# EAGLE board SparkFun_BME280_Breakout_Panel_v10 (EAGLE 7.3.0), part 1 of 9
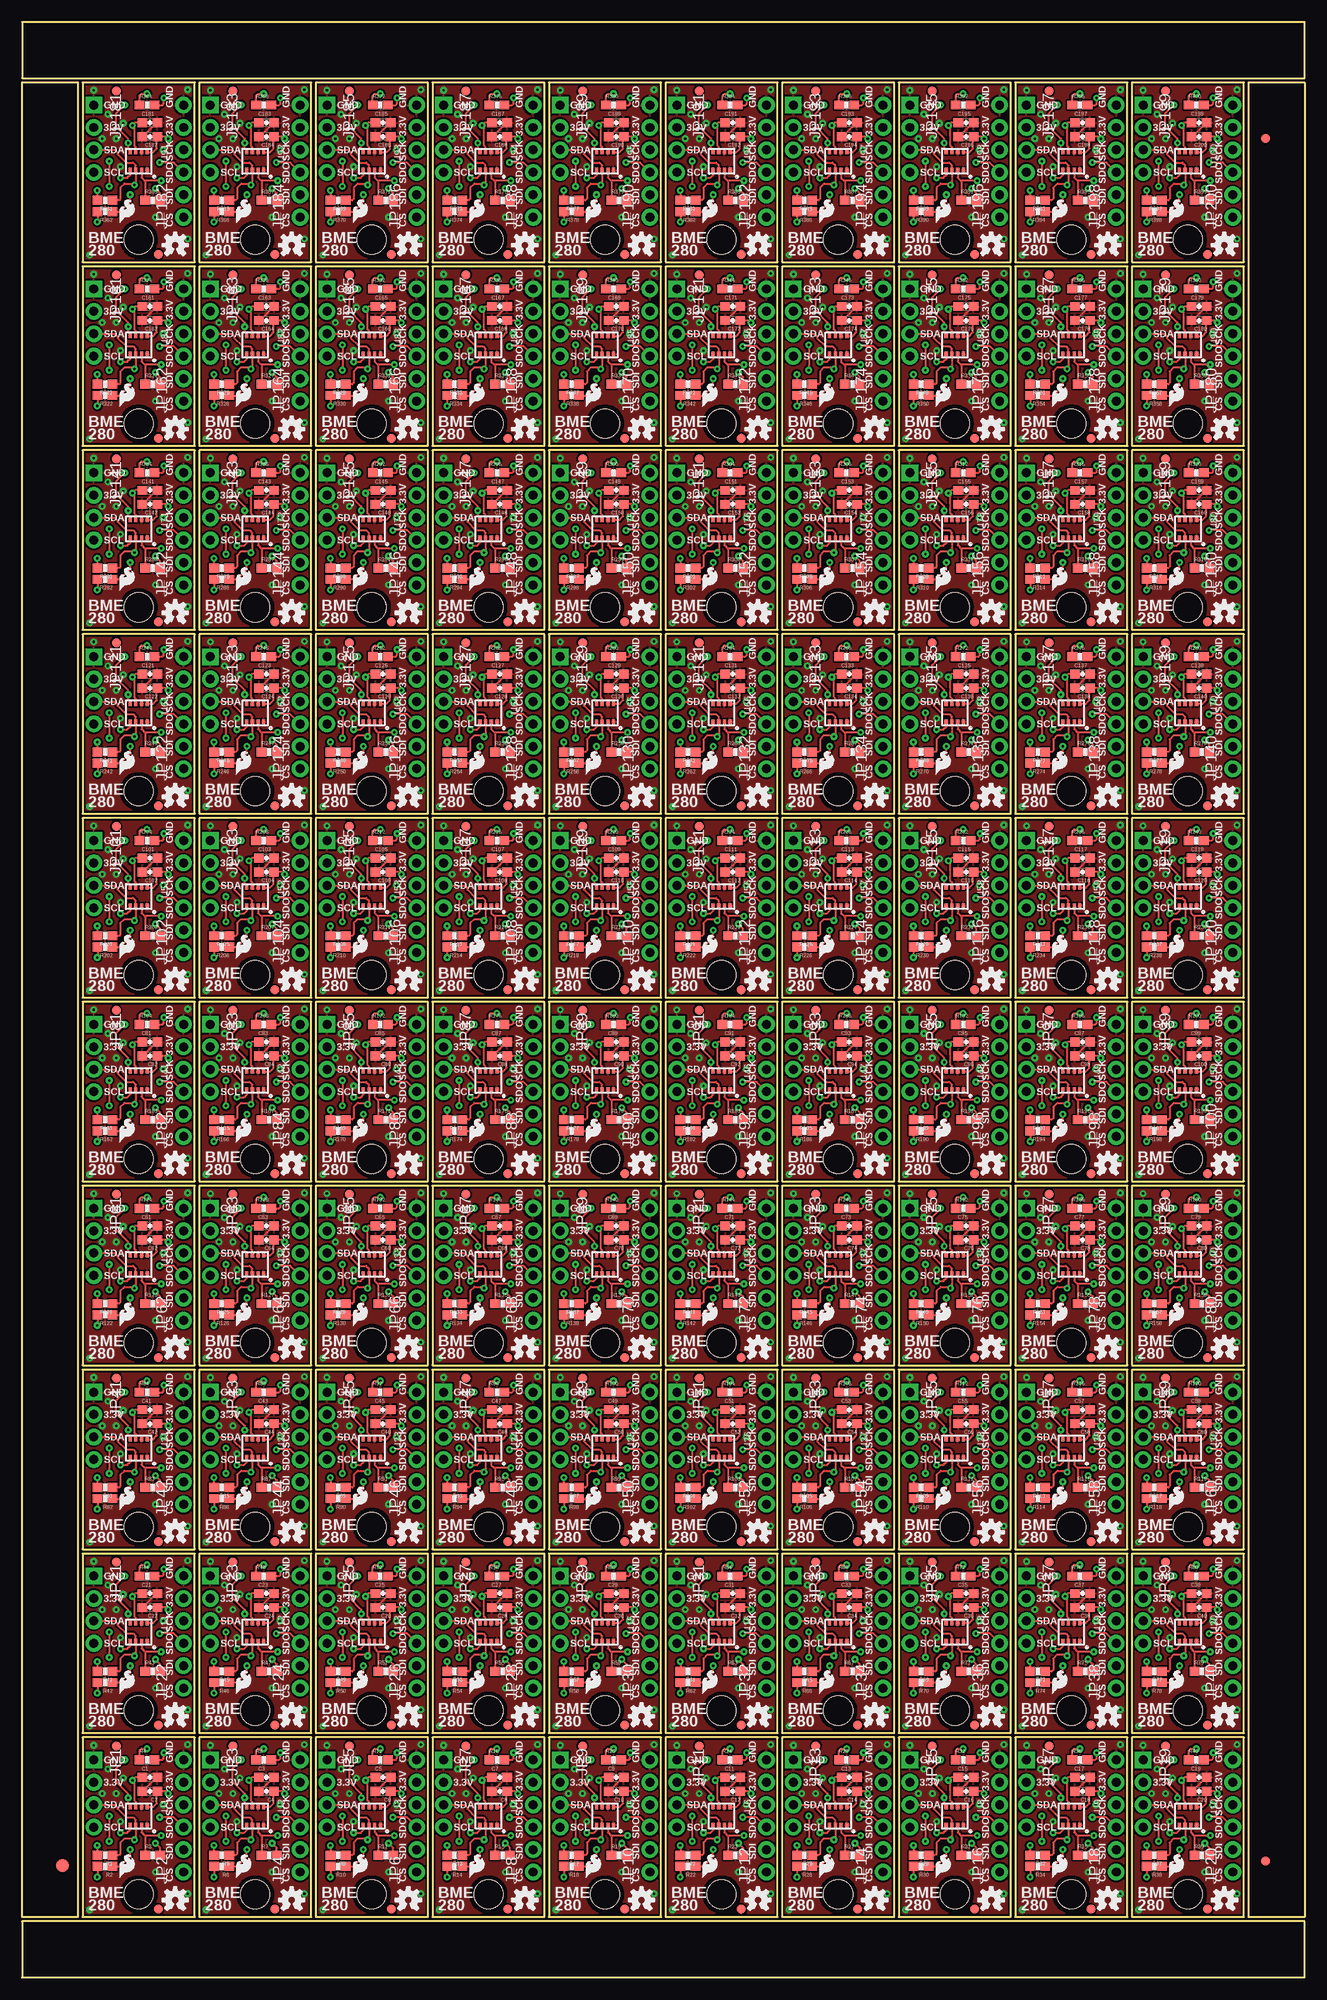
[diagram p0: board, top side]
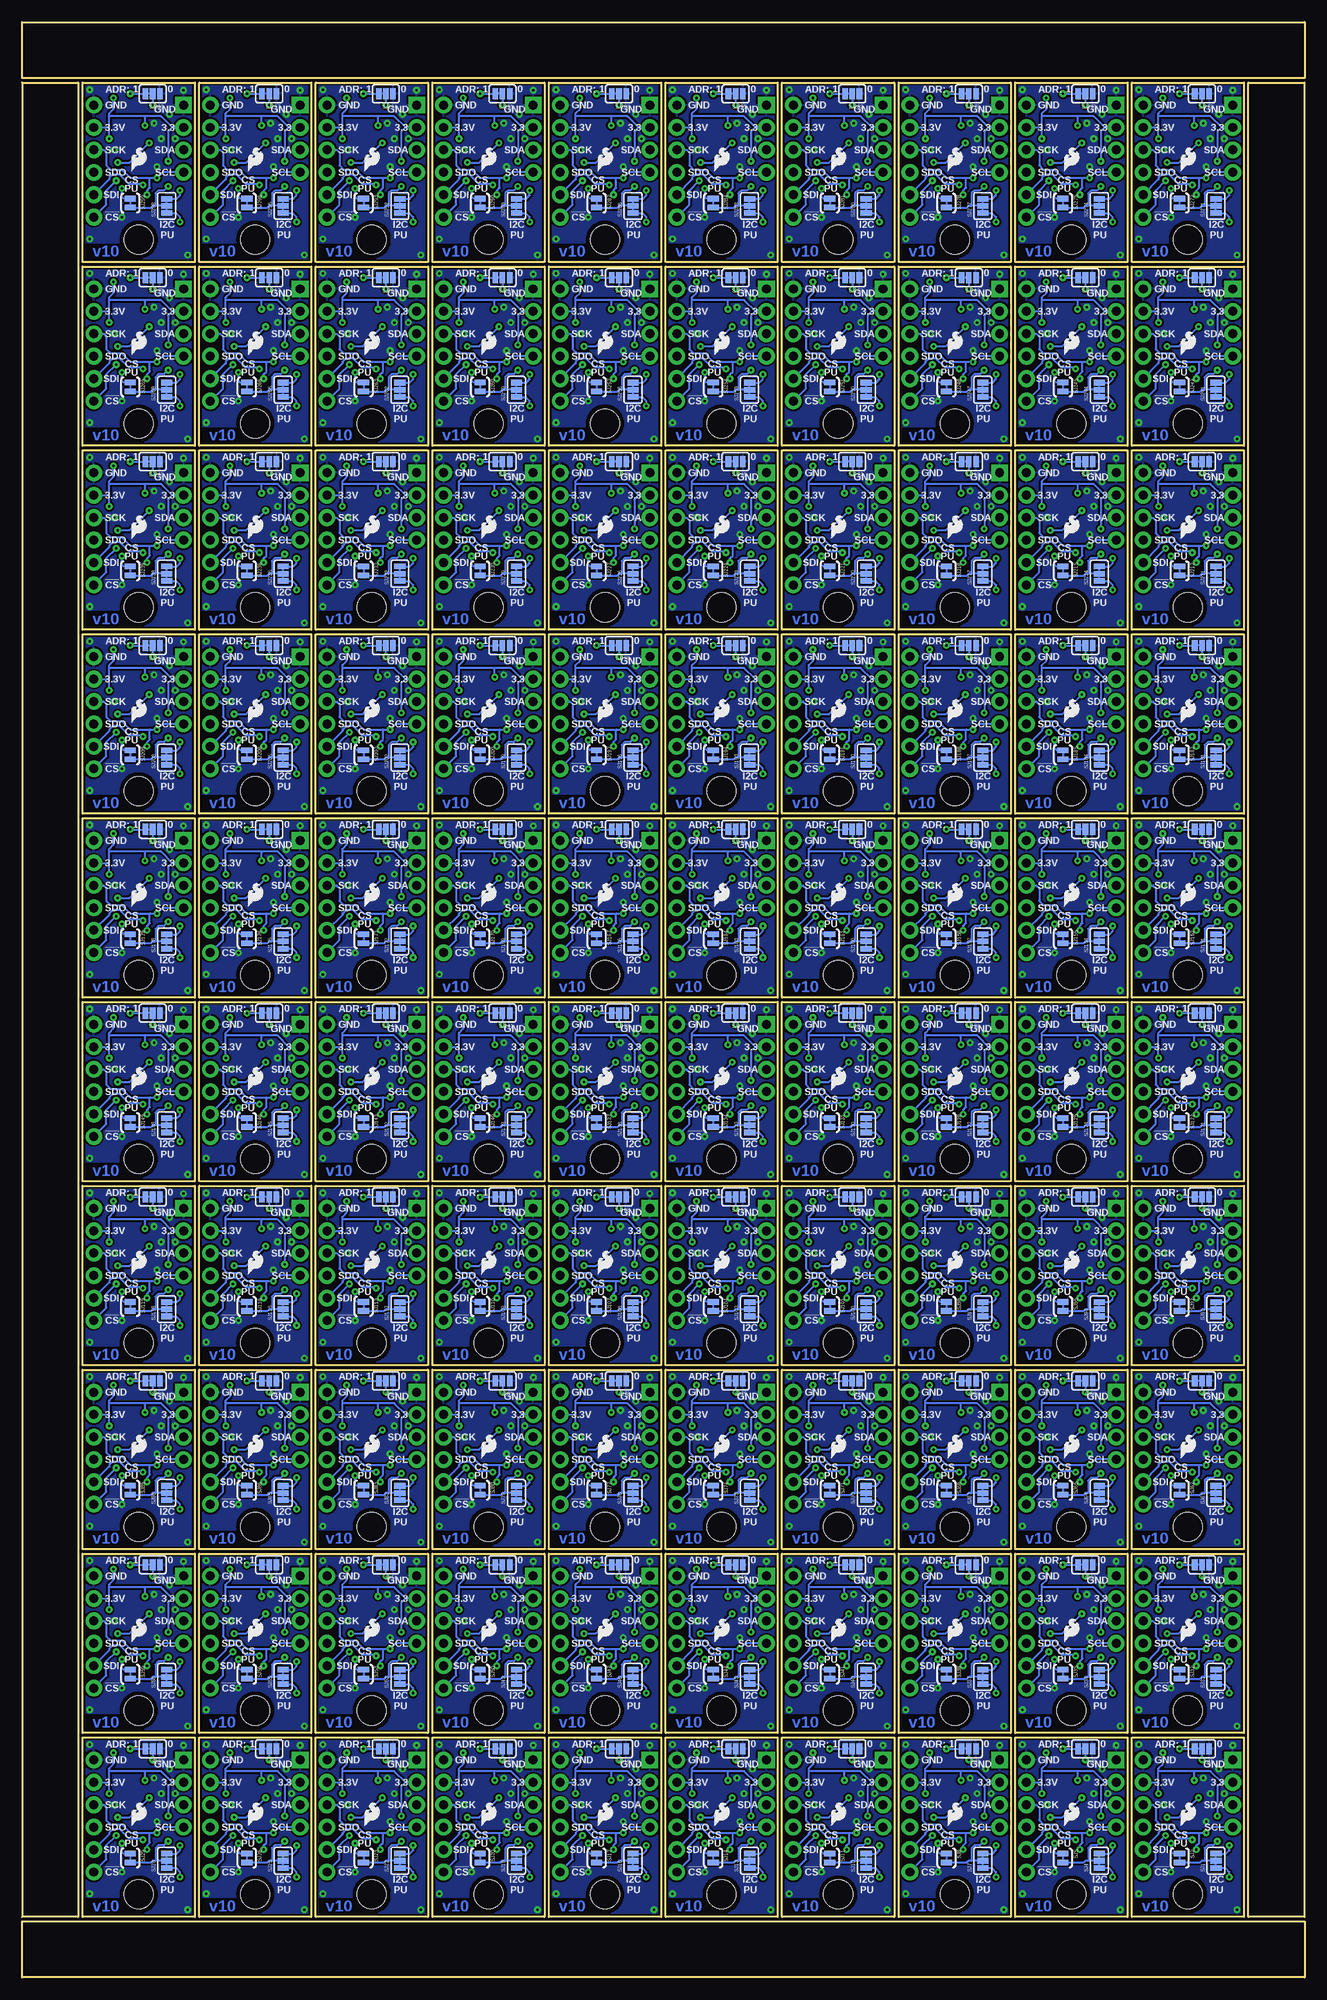
[diagram p1: board, bottom side, seen from below]

Size 145.29 x 221.49 mm. Coordinates in mm from the lower left corner, seen from the top.
Outline: 416 segments
Copper layers (1*16): Top 0.035mm / dielectric 1.5mm / Bottom 0.035mm
Design rules "SparkFun-2-layer": minimum track width 7mil, minimum drill 15mil, track to track 8mil, track to pad 8mil, pad to pad 8mil, via to via 8mil, smd to smd 8mil, copper to edge 8mil, drill to drill 8mil, minimum pad ring 12mil, minimum via ring 10mil, stop-mask expansion 4mil, vias tented up to drill 20mil, thermal gap 10mil

## Footprints (pad centres in the part's own frame; a part is rotated, then mirrored left to right if it is on the bottom)
0603-CAP = smd 1.1 x 1: 1 -0.85,0; 2 0.85,0
FIDUCIAL-1.5X3 = smd 1.5 x 1.5: 1 0,0
FIDUCIAL-1X2 = smd 1 x 1: 1 0,0
1X04_NO_SILK = drill 1.016 pad 1.88 square: 1 0,0 | drill 1.016 pad 1.88: 2 2.54,0; 3 5.08,0; 4 7.62,0
1X06_NO_SILK = drill 1.016 pad 1.88: 1 0,0; 2 2.54,0; 3 5.08,0; 4 7.62,0; 5 10.16,0; 6 12.7,0
0603-RES = smd 1.1 x 1: 1 -0.85,0; 2 0.85,0
PAD-JUMPER-3-3OF3_NC_BY_TRACE_YES_SILK_FULL_BOX = smd 0.635 x 1.27: 1 -0.813,0; 2 0,0; 3 0.813,0
PAD-JUMPER-2-NC_BY_TRACE_YES_SILK = smd 0.635 x 1.27: 1 -0.508,0; 2 0.508,0
PAD-JUMPER-3-2OF3_NC_BY_TRACE_YES_SILK_FULL_BOX = smd 0.635 x 1.27: 1 -0.813,0; 2 0,0; 3 0.813,0
STAND-OFF = hole 3.302: 0,0
BME280_LGA = smd 0.5 x 0.35: P$1 1.025,0.975; P$2 1.025,0.325; P$3 1.025,-0.325; P$4 1.025,-0.975; P$5 -1.025,-0.975; P$6 -1.025,-0.325; P$7 -1.025,0.325; P$8 -1.025,0.975

## Placement (x,y rotation side)
C1  0.1uF  [0603-CAP]  14.48,22.65 0 top
C2  0.1uF  [0603-CAP]  14.48,21.07 180 top
C3  0.1uF  [0603-CAP]  27.69,22.65 0 top
C4  0.1uF  [0603-CAP]  27.69,21.07 180 top
C5  0.1uF  [0603-CAP]  40.89,22.65 0 top
C6  0.1uF  [0603-CAP]  40.89,21.07 180 top
C7  0.1uF  [0603-CAP]  54.1,22.65 0 top
C8  0.1uF  [0603-CAP]  54.1,21.07 180 top
C9  0.1uF  [0603-CAP]  67.31,22.65 0 top
C10  0.1uF  [0603-CAP]  67.31,21.07 180 top
C11  0.1uF  [0603-CAP]  80.52,22.65 0 top
C12  0.1uF  [0603-CAP]  80.52,21.07 180 top
C13  0.1uF  [0603-CAP]  93.73,22.65 0 top
C14  0.1uF  [0603-CAP]  93.73,21.07 180 top
C15  0.1uF  [0603-CAP]  106.93,22.65 0 top
C16  0.1uF  [0603-CAP]  106.93,21.07 180 top
C17  0.1uF  [0603-CAP]  120.14,22.65 0 top
C18  0.1uF  [0603-CAP]  120.14,21.07 180 top
C19  0.1uF  [0603-CAP]  133.35,22.65 0 top
C20  0.1uF  [0603-CAP]  133.35,21.07 180 top
C21  0.1uF  [0603-CAP]  14.48,43.48 0 top
C22  0.1uF  [0603-CAP]  14.48,41.89 180 top
C23  0.1uF  [0603-CAP]  27.69,43.48 0 top
C24  0.1uF  [0603-CAP]  27.69,41.89 180 top
C25  0.1uF  [0603-CAP]  40.89,43.48 0 top
C26  0.1uF  [0603-CAP]  40.89,41.89 180 top
C27  0.1uF  [0603-CAP]  54.1,43.48 0 top
C28  0.1uF  [0603-CAP]  54.1,41.89 180 top
C29  0.1uF  [0603-CAP]  67.31,43.48 0 top
C30  0.1uF  [0603-CAP]  67.31,41.89 180 top
C31  0.1uF  [0603-CAP]  80.52,43.48 0 top
C32  0.1uF  [0603-CAP]  80.52,41.89 180 top
C33  0.1uF  [0603-CAP]  93.73,43.48 0 top
C34  0.1uF  [0603-CAP]  93.73,41.89 180 top
C35  0.1uF  [0603-CAP]  106.93,43.48 0 top
C36  0.1uF  [0603-CAP]  106.93,41.89 180 top
C37  0.1uF  [0603-CAP]  120.14,43.48 0 top
C38  0.1uF  [0603-CAP]  120.14,41.89 180 top
C39  0.1uF  [0603-CAP]  133.35,43.48 0 top
C40  0.1uF  [0603-CAP]  133.35,41.89 180 top
C41  0.1uF  [0603-CAP]  14.48,64.31 0 top
C42  0.1uF  [0603-CAP]  14.48,62.72 180 top
C43  0.1uF  [0603-CAP]  27.69,64.31 0 top
C44  0.1uF  [0603-CAP]  27.69,62.72 180 top
C45  0.1uF  [0603-CAP]  40.89,64.31 0 top
C46  0.1uF  [0603-CAP]  40.89,62.72 180 top
C47  0.1uF  [0603-CAP]  54.1,64.31 0 top
C48  0.1uF  [0603-CAP]  54.1,62.72 180 top
C49  0.1uF  [0603-CAP]  67.31,64.31 0 top
C50  0.1uF  [0603-CAP]  67.31,62.72 180 top
C51  0.1uF  [0603-CAP]  80.52,64.31 0 top
C52  0.1uF  [0603-CAP]  80.52,62.72 180 top
C53  0.1uF  [0603-CAP]  93.73,64.31 0 top
C54  0.1uF  [0603-CAP]  93.73,62.72 180 top
C55  0.1uF  [0603-CAP]  106.93,64.31 0 top
C56  0.1uF  [0603-CAP]  106.93,62.72 180 top
C57  0.1uF  [0603-CAP]  120.14,64.31 0 top
C58  0.1uF  [0603-CAP]  120.14,62.72 180 top
C59  0.1uF  [0603-CAP]  133.35,64.31 0 top
C60  0.1uF  [0603-CAP]  133.35,62.72 180 top
C61  0.1uF  [0603-CAP]  14.48,85.14 0 top
C62  0.1uF  [0603-CAP]  14.48,83.55 180 top
C63  0.1uF  [0603-CAP]  27.69,85.14 0 top
C64  0.1uF  [0603-CAP]  27.69,83.55 180 top
C65  0.1uF  [0603-CAP]  40.89,85.14 0 top
C66  0.1uF  [0603-CAP]  40.89,83.55 180 top
C67  0.1uF  [0603-CAP]  54.1,85.14 0 top
C68  0.1uF  [0603-CAP]  54.1,83.55 180 top
C69  0.1uF  [0603-CAP]  67.31,85.14 0 top
C70  0.1uF  [0603-CAP]  67.31,83.55 180 top
C71  0.1uF  [0603-CAP]  80.52,85.14 0 top
C72  0.1uF  [0603-CAP]  80.52,83.55 180 top
C73  0.1uF  [0603-CAP]  93.73,85.14 0 top
C74  0.1uF  [0603-CAP]  93.73,83.55 180 top
C75  0.1uF  [0603-CAP]  106.93,85.14 0 top
C76  0.1uF  [0603-CAP]  106.93,83.55 180 top
C77  0.1uF  [0603-CAP]  120.14,85.14 0 top
C78  0.1uF  [0603-CAP]  120.14,83.55 180 top
C79  0.1uF  [0603-CAP]  133.35,85.14 0 top
C80  0.1uF  [0603-CAP]  133.35,83.55 180 top
C81  0.1uF  [0603-CAP]  14.48,105.97 0 top
C82  0.1uF  [0603-CAP]  14.48,104.38 180 top
C83  0.1uF  [0603-CAP]  27.69,105.97 0 top
C84  0.1uF  [0603-CAP]  27.69,104.38 180 top
C85  0.1uF  [0603-CAP]  40.89,105.97 0 top
C86  0.1uF  [0603-CAP]  40.89,104.38 180 top
C87  0.1uF  [0603-CAP]  54.1,105.97 0 top
C88  0.1uF  [0603-CAP]  54.1,104.38 180 top
C89  0.1uF  [0603-CAP]  67.31,105.97 0 top
C90  0.1uF  [0603-CAP]  67.31,104.38 180 top
C91  0.1uF  [0603-CAP]  80.52,105.97 0 top
C92  0.1uF  [0603-CAP]  80.52,104.38 180 top
C93  0.1uF  [0603-CAP]  93.73,105.97 0 top
C94  0.1uF  [0603-CAP]  93.73,104.38 180 top
C95  0.1uF  [0603-CAP]  106.93,105.97 0 top
C96  0.1uF  [0603-CAP]  106.93,104.38 180 top
C97  0.1uF  [0603-CAP]  120.14,105.97 0 top
C98  0.1uF  [0603-CAP]  120.14,104.38 180 top
C99  0.1uF  [0603-CAP]  133.35,105.97 0 top
C100  0.1uF  [0603-CAP]  133.35,104.38 180 top
C101  0.1uF  [0603-CAP]  14.48,126.79 0 top
C102  0.1uF  [0603-CAP]  14.48,125.21 180 top
C103  0.1uF  [0603-CAP]  27.69,126.79 0 top
C104  0.1uF  [0603-CAP]  27.69,125.21 180 top
C105  0.1uF  [0603-CAP]  40.89,126.79 0 top
C106  0.1uF  [0603-CAP]  40.89,125.21 180 top
C107  0.1uF  [0603-CAP]  54.1,126.79 0 top
C108  0.1uF  [0603-CAP]  54.1,125.21 180 top
C109  0.1uF  [0603-CAP]  67.31,126.79 0 top
C110  0.1uF  [0603-CAP]  67.31,125.21 180 top
C111  0.1uF  [0603-CAP]  80.52,126.79 0 top
C112  0.1uF  [0603-CAP]  80.52,125.21 180 top
C113  0.1uF  [0603-CAP]  93.73,126.79 0 top
C114  0.1uF  [0603-CAP]  93.73,125.21 180 top
C115  0.1uF  [0603-CAP]  106.93,126.79 0 top
C116  0.1uF  [0603-CAP]  106.93,125.21 180 top
C117  0.1uF  [0603-CAP]  120.14,126.79 0 top
C118  0.1uF  [0603-CAP]  120.14,125.21 180 top
C119  0.1uF  [0603-CAP]  133.35,126.79 0 top
C120  0.1uF  [0603-CAP]  133.35,125.21 180 top
C121  0.1uF  [0603-CAP]  14.48,147.62 0 top
C122  0.1uF  [0603-CAP]  14.48,146.03 180 top
C123  0.1uF  [0603-CAP]  27.69,147.62 0 top
C124  0.1uF  [0603-CAP]  27.69,146.03 180 top
C125  0.1uF  [0603-CAP]  40.89,147.62 0 top
C126  0.1uF  [0603-CAP]  40.89,146.03 180 top
C127  0.1uF  [0603-CAP]  54.1,147.62 0 top
C128  0.1uF  [0603-CAP]  54.1,146.03 180 top
C129  0.1uF  [0603-CAP]  67.31,147.62 0 top
C130  0.1uF  [0603-CAP]  67.31,146.03 180 top
C131  0.1uF  [0603-CAP]  80.52,147.62 0 top
C132  0.1uF  [0603-CAP]  80.52,146.03 180 top
C133  0.1uF  [0603-CAP]  93.73,147.62 0 top
C134  0.1uF  [0603-CAP]  93.73,146.03 180 top
C135  0.1uF  [0603-CAP]  106.93,147.62 0 top
C136  0.1uF  [0603-CAP]  106.93,146.03 180 top
C137  0.1uF  [0603-CAP]  120.14,147.62 0 top
C138  0.1uF  [0603-CAP]  120.14,146.03 180 top
C139  0.1uF  [0603-CAP]  133.35,147.62 0 top
C140  0.1uF  [0603-CAP]  133.35,146.03 180 top
C141  0.1uF  [0603-CAP]  14.48,168.45 0 top
C142  0.1uF  [0603-CAP]  14.48,166.86 180 top
C143  0.1uF  [0603-CAP]  27.69,168.45 0 top
C144  0.1uF  [0603-CAP]  27.69,166.86 180 top
C145  0.1uF  [0603-CAP]  40.89,168.45 0 top
C146  0.1uF  [0603-CAP]  40.89,166.86 180 top
C147  0.1uF  [0603-CAP]  54.1,168.45 0 top
C148  0.1uF  [0603-CAP]  54.1,166.86 180 top
C149  0.1uF  [0603-CAP]  67.31,168.45 0 top
C150  0.1uF  [0603-CAP]  67.31,166.86 180 top
C151  0.1uF  [0603-CAP]  80.52,168.45 0 top
C152  0.1uF  [0603-CAP]  80.52,166.86 180 top
C153  0.1uF  [0603-CAP]  93.73,168.45 0 top
C154  0.1uF  [0603-CAP]  93.73,166.86 180 top
C155  0.1uF  [0603-CAP]  106.93,168.45 0 top
C156  0.1uF  [0603-CAP]  106.93,166.86 180 top
C157  0.1uF  [0603-CAP]  120.14,168.45 0 top
C158  0.1uF  [0603-CAP]  120.14,166.86 180 top
C159  0.1uF  [0603-CAP]  133.35,168.45 0 top
C160  0.1uF  [0603-CAP]  133.35,166.86 180 top
C161  0.1uF  [0603-CAP]  14.48,189.28 0 top
C162  0.1uF  [0603-CAP]  14.48,187.69 180 top
C163  0.1uF  [0603-CAP]  27.69,189.28 0 top
C164  0.1uF  [0603-CAP]  27.69,187.69 180 top
C165  0.1uF  [0603-CAP]  40.89,189.28 0 top
C166  0.1uF  [0603-CAP]  40.89,187.69 180 top
C167  0.1uF  [0603-CAP]  54.1,189.28 0 top
C168  0.1uF  [0603-CAP]  54.1,187.69 180 top
C169  0.1uF  [0603-CAP]  67.31,189.28 0 top
C170  0.1uF  [0603-CAP]  67.31,187.69 180 top
C171  0.1uF  [0603-CAP]  80.52,189.28 0 top
C172  0.1uF  [0603-CAP]  80.52,187.69 180 top
C173  0.1uF  [0603-CAP]  93.73,189.28 0 top
C174  0.1uF  [0603-CAP]  93.73,187.69 180 top
C175  0.1uF  [0603-CAP]  106.93,189.28 0 top
C176  0.1uF  [0603-CAP]  106.93,187.69 180 top
C177  0.1uF  [0603-CAP]  120.14,189.28 0 top
C178  0.1uF  [0603-CAP]  120.14,187.69 180 top
C179  0.1uF  [0603-CAP]  133.35,189.28 0 top
C180  0.1uF  [0603-CAP]  133.35,187.69 180 top
C181  0.1uF  [0603-CAP]  14.48,210.11 0 top
C182  0.1uF  [0603-CAP]  14.48,208.52 180 top
C183  0.1uF  [0603-CAP]  27.69,210.11 0 top
C184  0.1uF  [0603-CAP]  27.69,208.52 180 top
C185  0.1uF  [0603-CAP]  40.89,210.11 0 top
C186  0.1uF  [0603-CAP]  40.89,208.52 180 top
C187  0.1uF  [0603-CAP]  54.1,210.11 0 top
C188  0.1uF  [0603-CAP]  54.1,208.52 180 top
C189  0.1uF  [0603-CAP]  67.31,210.11 0 top
C190  0.1uF  [0603-CAP]  67.31,208.52 180 top
C191  0.1uF  [0603-CAP]  80.52,210.11 0 top
C192  0.1uF  [0603-CAP]  80.52,208.52 180 top
C193  0.1uF  [0603-CAP]  93.73,210.11 0 top
C194  0.1uF  [0603-CAP]  93.73,208.52 180 top
C195  0.1uF  [0603-CAP]  106.93,210.11 0 top
C196  0.1uF  [0603-CAP]  106.93,208.52 180 top
C197  0.1uF  [0603-CAP]  120.14,210.11 0 top
C198  0.1uF  [0603-CAP]  120.14,208.52 180 top
C199  0.1uF  [0603-CAP]  133.35,210.11 0 top
C200  0.1uF  [0603-CAP]  133.35,208.52 180 top
E$1  [FIDUCIAL-1.5X3]  4.57,12.7 0 top
E$5  [FIDUCIAL-1X2]  140.84,208.28 180 top
E$6  [FIDUCIAL-1X2]  140.84,13.21 0 top
FID1  FIDUCIAL1X2  [FIDUCIAL-1X2]  10.67,26.23 0 top
FID2  FIDUCIAL1X2  [FIDUCIAL-1X2]  15.43,7.73 0 top
FID3  FIDUCIAL1X2  [FIDUCIAL-1X2]  23.88,26.23 0 top
FID4  FIDUCIAL1X2  [FIDUCIAL-1X2]  28.64,7.73 0 top
FID5  FIDUCIAL1X2  [FIDUCIAL-1X2]  37.08,26.23 0 top
FID6  FIDUCIAL1X2  [FIDUCIAL-1X2]  41.85,7.73 0 top
FID7  FIDUCIAL1X2  [FIDUCIAL-1X2]  50.29,26.23 0 top
FID8  FIDUCIAL1X2  [FIDUCIAL-1X2]  55.05,7.73 0 top
FID9  FIDUCIAL1X2  [FIDUCIAL-1X2]  63.5,26.23 0 top
FID10  FIDUCIAL1X2  [FIDUCIAL-1X2]  68.26,7.73 0 top
FID11  FIDUCIAL1X2  [FIDUCIAL-1X2]  76.71,26.23 0 top
FID12  FIDUCIAL1X2  [FIDUCIAL-1X2]  81.47,7.73 0 top
FID13  FIDUCIAL1X2  [FIDUCIAL-1X2]  89.92,26.23 0 top
FID14  FIDUCIAL1X2  [FIDUCIAL-1X2]  94.68,7.73 0 top
FID15  FIDUCIAL1X2  [FIDUCIAL-1X2]  103.12,26.23 0 top
FID16  FIDUCIAL1X2  [FIDUCIAL-1X2]  107.89,7.73 0 top
FID17  FIDUCIAL1X2  [FIDUCIAL-1X2]  116.33,26.23 0 top
FID18  FIDUCIAL1X2  [FIDUCIAL-1X2]  121.09,7.73 0 top
FID19  FIDUCIAL1X2  [FIDUCIAL-1X2]  129.54,26.23 0 top
FID20  FIDUCIAL1X2  [FIDUCIAL-1X2]  134.3,7.73 0 top
FID21  FIDUCIAL1X2  [FIDUCIAL-1X2]  10.67,47.05 0 top
FID22  FIDUCIAL1X2  [FIDUCIAL-1X2]  15.43,28.56 0 top
FID23  FIDUCIAL1X2  [FIDUCIAL-1X2]  23.88,47.05 0 top
FID24  FIDUCIAL1X2  [FIDUCIAL-1X2]  28.64,28.56 0 top
FID25  FIDUCIAL1X2  [FIDUCIAL-1X2]  37.08,47.05 0 top
FID26  FIDUCIAL1X2  [FIDUCIAL-1X2]  41.85,28.56 0 top
FID27  FIDUCIAL1X2  [FIDUCIAL-1X2]  50.29,47.05 0 top
FID28  FIDUCIAL1X2  [FIDUCIAL-1X2]  55.05,28.56 0 top
FID29  FIDUCIAL1X2  [FIDUCIAL-1X2]  63.5,47.05 0 top
FID30  FIDUCIAL1X2  [FIDUCIAL-1X2]  68.26,28.56 0 top
FID31  FIDUCIAL1X2  [FIDUCIAL-1X2]  76.71,47.05 0 top
FID32  FIDUCIAL1X2  [FIDUCIAL-1X2]  81.47,28.56 0 top
FID33  FIDUCIAL1X2  [FIDUCIAL-1X2]  89.92,47.05 0 top
FID34  FIDUCIAL1X2  [FIDUCIAL-1X2]  94.68,28.56 0 top
FID35  FIDUCIAL1X2  [FIDUCIAL-1X2]  103.12,47.05 0 top
FID36  FIDUCIAL1X2  [FIDUCIAL-1X2]  107.89,28.56 0 top
FID37  FIDUCIAL1X2  [FIDUCIAL-1X2]  116.33,47.05 0 top
FID38  FIDUCIAL1X2  [FIDUCIAL-1X2]  121.09,28.56 0 top
FID39  FIDUCIAL1X2  [FIDUCIAL-1X2]  129.54,47.05 0 top
FID40  FIDUCIAL1X2  [FIDUCIAL-1X2]  134.3,28.56 0 top
FID41  FIDUCIAL1X2  [FIDUCIAL-1X2]  10.67,67.88 0 top
FID42  FIDUCIAL1X2  [FIDUCIAL-1X2]  15.43,49.39 0 top
FID43  FIDUCIAL1X2  [FIDUCIAL-1X2]  23.88,67.88 0 top
FID44  FIDUCIAL1X2  [FIDUCIAL-1X2]  28.64,49.39 0 top
FID45  FIDUCIAL1X2  [FIDUCIAL-1X2]  37.08,67.88 0 top
FID46  FIDUCIAL1X2  [FIDUCIAL-1X2]  41.85,49.39 0 top
FID47  FIDUCIAL1X2  [FIDUCIAL-1X2]  50.29,67.88 0 top
FID48  FIDUCIAL1X2  [FIDUCIAL-1X2]  55.05,49.39 0 top
FID49  FIDUCIAL1X2  [FIDUCIAL-1X2]  63.5,67.88 0 top
FID50  FIDUCIAL1X2  [FIDUCIAL-1X2]  68.26,49.39 0 top
FID51  FIDUCIAL1X2  [FIDUCIAL-1X2]  76.71,67.88 0 top
FID52  FIDUCIAL1X2  [FIDUCIAL-1X2]  81.47,49.39 0 top
FID53  FIDUCIAL1X2  [FIDUCIAL-1X2]  89.92,67.88 0 top
FID54  FIDUCIAL1X2  [FIDUCIAL-1X2]  94.68,49.39 0 top
FID55  FIDUCIAL1X2  [FIDUCIAL-1X2]  103.12,67.88 0 top
FID56  FIDUCIAL1X2  [FIDUCIAL-1X2]  107.89,49.39 0 top
FID57  FIDUCIAL1X2  [FIDUCIAL-1X2]  116.33,67.88 0 top
FID58  FIDUCIAL1X2  [FIDUCIAL-1X2]  121.09,49.39 0 top
FID59  FIDUCIAL1X2  [FIDUCIAL-1X2]  129.54,67.88 0 top
FID60  FIDUCIAL1X2  [FIDUCIAL-1X2]  134.3,49.39 0 top
FID61  FIDUCIAL1X2  [FIDUCIAL-1X2]  10.67,88.71 0 top
FID62  FIDUCIAL1X2  [FIDUCIAL-1X2]  15.43,70.22 0 top
FID63  FIDUCIAL1X2  [FIDUCIAL-1X2]  23.88,88.71 0 top
FID64  FIDUCIAL1X2  [FIDUCIAL-1X2]  28.64,70.22 0 top
FID65  FIDUCIAL1X2  [FIDUCIAL-1X2]  37.08,88.71 0 top
FID66  FIDUCIAL1X2  [FIDUCIAL-1X2]  41.85,70.22 0 top
FID67  FIDUCIAL1X2  [FIDUCIAL-1X2]  50.29,88.71 0 top
FID68  FIDUCIAL1X2  [FIDUCIAL-1X2]  55.05,70.22 0 top
FID69  FIDUCIAL1X2  [FIDUCIAL-1X2]  63.5,88.71 0 top
FID70  FIDUCIAL1X2  [FIDUCIAL-1X2]  68.26,70.22 0 top
FID71  FIDUCIAL1X2  [FIDUCIAL-1X2]  76.71,88.71 0 top
FID72  FIDUCIAL1X2  [FIDUCIAL-1X2]  81.47,70.22 0 top
FID73  FIDUCIAL1X2  [FIDUCIAL-1X2]  89.92,88.71 0 top
FID74  FIDUCIAL1X2  [FIDUCIAL-1X2]  94.68,70.22 0 top
FID75  FIDUCIAL1X2  [FIDUCIAL-1X2]  103.12,88.71 0 top
FID76  FIDUCIAL1X2  [FIDUCIAL-1X2]  107.89,70.22 0 top
FID77  FIDUCIAL1X2  [FIDUCIAL-1X2]  116.33,88.71 0 top
FID78  FIDUCIAL1X2  [FIDUCIAL-1X2]  121.09,70.22 0 top
FID79  FIDUCIAL1X2  [FIDUCIAL-1X2]  129.54,88.71 0 top
FID80  FIDUCIAL1X2  [FIDUCIAL-1X2]  134.3,70.22 0 top
FID81  FIDUCIAL1X2  [FIDUCIAL-1X2]  10.67,109.54 0 top
FID82  FIDUCIAL1X2  [FIDUCIAL-1X2]  15.43,91.04 0 top
FID83  FIDUCIAL1X2  [FIDUCIAL-1X2]  23.88,109.54 0 top
FID84  FIDUCIAL1X2  [FIDUCIAL-1X2]  28.64,91.04 0 top
FID85  FIDUCIAL1X2  [FIDUCIAL-1X2]  37.08,109.54 0 top
FID86  FIDUCIAL1X2  [FIDUCIAL-1X2]  41.85,91.04 0 top
FID87  FIDUCIAL1X2  [FIDUCIAL-1X2]  50.29,109.54 0 top
FID88  FIDUCIAL1X2  [FIDUCIAL-1X2]  55.05,91.04 0 top
FID89  FIDUCIAL1X2  [FIDUCIAL-1X2]  63.5,109.54 0 top
FID90  FIDUCIAL1X2  [FIDUCIAL-1X2]  68.26,91.04 0 top
FID91  FIDUCIAL1X2  [FIDUCIAL-1X2]  76.71,109.54 0 top
FID92  FIDUCIAL1X2  [FIDUCIAL-1X2]  81.47,91.04 0 top
FID93  FIDUCIAL1X2  [FIDUCIAL-1X2]  89.92,109.54 0 top
FID94  FIDUCIAL1X2  [FIDUCIAL-1X2]  94.68,91.04 0 top
FID95  FIDUCIAL1X2  [FIDUCIAL-1X2]  103.12,109.54 0 top
FID96  FIDUCIAL1X2  [FIDUCIAL-1X2]  107.89,91.04 0 top
FID97  FIDUCIAL1X2  [FIDUCIAL-1X2]  116.33,109.54 0 top
FID98  FIDUCIAL1X2  [FIDUCIAL-1X2]  121.09,91.04 0 top
FID99  FIDUCIAL1X2  [FIDUCIAL-1X2]  129.54,109.54 0 top
FID100  FIDUCIAL1X2  [FIDUCIAL-1X2]  134.3,91.04 0 top
FID101  FIDUCIAL1X2  [FIDUCIAL-1X2]  10.67,130.37 0 top
FID102  FIDUCIAL1X2  [FIDUCIAL-1X2]  15.43,111.87 0 top
FID103  FIDUCIAL1X2  [FIDUCIAL-1X2]  23.88,130.37 0 top
FID104  FIDUCIAL1X2  [FIDUCIAL-1X2]  28.64,111.87 0 top
FID105  FIDUCIAL1X2  [FIDUCIAL-1X2]  37.08,130.37 0 top
FID106  FIDUCIAL1X2  [FIDUCIAL-1X2]  41.85,111.87 0 top
FID107  FIDUCIAL1X2  [FIDUCIAL-1X2]  50.29,130.37 0 top
FID108  FIDUCIAL1X2  [FIDUCIAL-1X2]  55.05,111.87 0 top
FID109  FIDUCIAL1X2  [FIDUCIAL-1X2]  63.5,130.37 0 top
FID110  FIDUCIAL1X2  [FIDUCIAL-1X2]  68.26,111.87 0 top
FID111  FIDUCIAL1X2  [FIDUCIAL-1X2]  76.71,130.37 0 top
FID112  FIDUCIAL1X2  [FIDUCIAL-1X2]  81.47,111.87 0 top
FID113  FIDUCIAL1X2  [FIDUCIAL-1X2]  89.92,130.37 0 top
FID114  FIDUCIAL1X2  [FIDUCIAL-1X2]  94.68,111.87 0 top
FID115  FIDUCIAL1X2  [FIDUCIAL-1X2]  103.12,130.37 0 top
FID116  FIDUCIAL1X2  [FIDUCIAL-1X2]  107.89,111.87 0 top
FID117  FIDUCIAL1X2  [FIDUCIAL-1X2]  116.33,130.37 0 top
FID118  FIDUCIAL1X2  [FIDUCIAL-1X2]  121.09,111.87 0 top
FID119  FIDUCIAL1X2  [FIDUCIAL-1X2]  129.54,130.37 0 top
FID120  FIDUCIAL1X2  [FIDUCIAL-1X2]  134.3,111.87 0 top
FID121  FIDUCIAL1X2  [FIDUCIAL-1X2]  10.67,151.19 0 top
FID122  FIDUCIAL1X2  [FIDUCIAL-1X2]  15.43,132.7 0 top
FID123  FIDUCIAL1X2  [FIDUCIAL-1X2]  23.88,151.19 0 top
FID124  FIDUCIAL1X2  [FIDUCIAL-1X2]  28.64,132.7 0 top
FID125  FIDUCIAL1X2  [FIDUCIAL-1X2]  37.08,151.19 0 top
FID126  FIDUCIAL1X2  [FIDUCIAL-1X2]  41.85,132.7 0 top
FID127  FIDUCIAL1X2  [FIDUCIAL-1X2]  50.29,151.19 0 top
FID128  FIDUCIAL1X2  [FIDUCIAL-1X2]  55.05,132.7 0 top
FID129  FIDUCIAL1X2  [FIDUCIAL-1X2]  63.5,151.19 0 top
FID130  FIDUCIAL1X2  [FIDUCIAL-1X2]  68.26,132.7 0 top
FID131  FIDUCIAL1X2  [FIDUCIAL-1X2]  76.71,151.19 0 top
FID132  FIDUCIAL1X2  [FIDUCIAL-1X2]  81.47,132.7 0 top
FID133  FIDUCIAL1X2  [FIDUCIAL-1X2]  89.92,151.19 0 top
FID134  FIDUCIAL1X2  [FIDUCIAL-1X2]  94.68,132.7 0 top
FID135  FIDUCIAL1X2  [FIDUCIAL-1X2]  103.12,151.19 0 top
FID136  FIDUCIAL1X2  [FIDUCIAL-1X2]  107.89,132.7 0 top
FID137  FIDUCIAL1X2  [FIDUCIAL-1X2]  116.33,151.19 0 top
FID138  FIDUCIAL1X2  [FIDUCIAL-1X2]  121.09,132.7 0 top
FID139  FIDUCIAL1X2  [FIDUCIAL-1X2]  129.54,151.19 0 top
FID140  FIDUCIAL1X2  [FIDUCIAL-1X2]  134.3,132.7 0 top
FID141  FIDUCIAL1X2  [FIDUCIAL-1X2]  10.67,172.02 0 top
FID142  FIDUCIAL1X2  [FIDUCIAL-1X2]  15.43,153.53 0 top
FID143  FIDUCIAL1X2  [FIDUCIAL-1X2]  23.88,172.02 0 top
FID144  FIDUCIAL1X2  [FIDUCIAL-1X2]  28.64,153.53 0 top
FID145  FIDUCIAL1X2  [FIDUCIAL-1X2]  37.08,172.02 0 top
FID146  FIDUCIAL1X2  [FIDUCIAL-1X2]  41.85,153.53 0 top
FID147  FIDUCIAL1X2  [FIDUCIAL-1X2]  50.29,172.02 0 top
FID148  FIDUCIAL1X2  [FIDUCIAL-1X2]  55.05,153.53 0 top
FID149  FIDUCIAL1X2  [FIDUCIAL-1X2]  63.5,172.02 0 top
FID150  FIDUCIAL1X2  [FIDUCIAL-1X2]  68.26,153.53 0 top
FID151  FIDUCIAL1X2  [FIDUCIAL-1X2]  76.71,172.02 0 top
FID152  FIDUCIAL1X2  [FIDUCIAL-1X2]  81.47,153.53 0 top
FID153  FIDUCIAL1X2  [FIDUCIAL-1X2]  89.92,172.02 0 top
FID154  FIDUCIAL1X2  [FIDUCIAL-1X2]  94.68,153.53 0 top
FID155  FIDUCIAL1X2  [FIDUCIAL-1X2]  103.12,172.02 0 top
FID156  FIDUCIAL1X2  [FIDUCIAL-1X2]  107.89,153.53 0 top
FID157  FIDUCIAL1X2  [FIDUCIAL-1X2]  116.33,172.02 0 top
FID158  FIDUCIAL1X2  [FIDUCIAL-1X2]  121.09,153.53 0 top
FID159  FIDUCIAL1X2  [FIDUCIAL-1X2]  129.54,172.02 0 top
FID160  FIDUCIAL1X2  [FIDUCIAL-1X2]  134.3,153.53 0 top
FID161  FIDUCIAL1X2  [FIDUCIAL-1X2]  10.67,192.85 0 top
FID162  FIDUCIAL1X2  [FIDUCIAL-1X2]  15.43,174.36 0 top
FID163  FIDUCIAL1X2  [FIDUCIAL-1X2]  23.88,192.85 0 top
FID164  FIDUCIAL1X2  [FIDUCIAL-1X2]  28.64,174.36 0 top
FID165  FIDUCIAL1X2  [FIDUCIAL-1X2]  37.08,192.85 0 top
FID166  FIDUCIAL1X2  [FIDUCIAL-1X2]  41.85,174.36 0 top
FID167  FIDUCIAL1X2  [FIDUCIAL-1X2]  50.29,192.85 0 top
FID168  FIDUCIAL1X2  [FIDUCIAL-1X2]  55.05,174.36 0 top
FID169  FIDUCIAL1X2  [FIDUCIAL-1X2]  63.5,192.85 0 top
FID170  FIDUCIAL1X2  [FIDUCIAL-1X2]  68.26,174.36 0 top
FID171  FIDUCIAL1X2  [FIDUCIAL-1X2]  76.71,192.85 0 top
FID172  FIDUCIAL1X2  [FIDUCIAL-1X2]  81.47,174.36 0 top
FID173  FIDUCIAL1X2  [FIDUCIAL-1X2]  89.92,192.85 0 top
FID174  FIDUCIAL1X2  [FIDUCIAL-1X2]  94.68,174.36 0 top
FID175  FIDUCIAL1X2  [FIDUCIAL-1X2]  103.12,192.85 0 top
FID176  FIDUCIAL1X2  [FIDUCIAL-1X2]  107.89,174.36 0 top
FID177  FIDUCIAL1X2  [FIDUCIAL-1X2]  116.33,192.85 0 top
FID178  FIDUCIAL1X2  [FIDUCIAL-1X2]  121.09,174.36 0 top
FID179  FIDUCIAL1X2  [FIDUCIAL-1X2]  129.54,192.85 0 top
FID180  FIDUCIAL1X2  [FIDUCIAL-1X2]  134.3,174.36 0 top
FID181  FIDUCIAL1X2  [FIDUCIAL-1X2]  10.67,213.68 0 top
FID182  FIDUCIAL1X2  [FIDUCIAL-1X2]  15.43,195.18 0 top
FID183  FIDUCIAL1X2  [FIDUCIAL-1X2]  23.88,213.68 0 top
FID184  FIDUCIAL1X2  [FIDUCIAL-1X2]  28.64,195.18 0 top
FID185  FIDUCIAL1X2  [FIDUCIAL-1X2]  37.08,213.68 0 top
FID186  FIDUCIAL1X2  [FIDUCIAL-1X2]  41.85,195.18 0 top
FID187  FIDUCIAL1X2  [FIDUCIAL-1X2]  50.29,213.68 0 top
FID188  FIDUCIAL1X2  [FIDUCIAL-1X2]  55.05,195.18 0 top
FID189  FIDUCIAL1X2  [FIDUCIAL-1X2]  63.5,213.68 0 top
FID190  FIDUCIAL1X2  [FIDUCIAL-1X2]  68.26,195.18 0 top
FID191  FIDUCIAL1X2  [FIDUCIAL-1X2]  76.71,213.68 0 top
FID192  FIDUCIAL1X2  [FIDUCIAL-1X2]  81.47,195.18 0 top
FID193  FIDUCIAL1X2  [FIDUCIAL-1X2]  89.92,213.68 0 top
FID194  FIDUCIAL1X2  [FIDUCIAL-1X2]  94.68,195.18 0 top
FID195  FIDUCIAL1X2  [FIDUCIAL-1X2]  103.12,213.68 0 top
FID196  FIDUCIAL1X2  [FIDUCIAL-1X2]  107.89,195.18 0 top
FID197  FIDUCIAL1X2  [FIDUCIAL-1X2]  116.33,213.68 0 top
FID198  FIDUCIAL1X2  [FIDUCIAL-1X2]  121.09,195.18 0 top
FID199  FIDUCIAL1X2  [FIDUCIAL-1X2]  129.54,213.68 0 top
FID200  FIDUCIAL1X2  [FIDUCIAL-1X2]  134.3,195.18 0 top
JP1  [1X04_NO_SILK]  8.13,24.64 270 top
JP2  [1X06_NO_SILK]  18.29,11.94 90 top
JP3  [1X04_NO_SILK]  21.34,24.64 270 top
JP4  [1X06_NO_SILK]  31.5,11.94 90 top
JP5  [1X04_NO_SILK]  34.54,24.64 270 top
JP6  [1X06_NO_SILK]  44.7,11.94 90 top
JP7  [1X04_NO_SILK]  47.75,24.64 270 top
JP8  [1X06_NO_SILK]  57.91,11.94 90 top
JP9  [1X04_NO_SILK]  60.96,24.64 270 top
JP10  [1X06_NO_SILK]  71.12,11.94 90 top
JP11  [1X04_NO_SILK]  74.17,24.64 270 top
JP12  [1X06_NO_SILK]  84.33,11.94 90 top
JP13  [1X04_NO_SILK]  87.38,24.64 270 top
JP14  [1X06_NO_SILK]  97.54,11.94 90 top
JP15  [1X04_NO_SILK]  100.58,24.64 270 top
JP16  [1X06_NO_SILK]  110.74,11.94 90 top
JP17  [1X04_NO_SILK]  113.79,24.64 270 top
JP18  [1X06_NO_SILK]  123.95,11.94 90 top
JP19  [1X04_NO_SILK]  127,24.64 270 top
JP20  [1X06_NO_SILK]  137.16,11.94 90 top
JP21  [1X04_NO_SILK]  8.13,45.47 270 top
JP22  [1X06_NO_SILK]  18.29,32.77 90 top
JP23  [1X04_NO_SILK]  21.34,45.47 270 top
JP24  [1X06_NO_SILK]  31.5,32.77 90 top
JP25  [1X04_NO_SILK]  34.54,45.47 270 top
JP26  [1X06_NO_SILK]  44.7,32.77 90 top
JP27  [1X04_NO_SILK]  47.75,45.47 270 top
JP28  [1X06_NO_SILK]  57.91,32.77 90 top
JP29  [1X04_NO_SILK]  60.96,45.47 270 top
JP30  [1X06_NO_SILK]  71.12,32.77 90 top
JP31  [1X04_NO_SILK]  74.17,45.47 270 top
JP32  [1X06_NO_SILK]  84.33,32.77 90 top
JP33  [1X04_NO_SILK]  87.38,45.47 270 top
JP34  [1X06_NO_SILK]  97.54,32.77 90 top
JP35  [1X04_NO_SILK]  100.58,45.47 270 top
JP36  [1X06_NO_SILK]  110.74,32.77 90 top
JP37  [1X04_NO_SILK]  113.79,45.47 270 top
JP38  [1X06_NO_SILK]  123.95,32.77 90 top
JP39  [1X04_NO_SILK]  127,45.47 270 top
JP40  [1X06_NO_SILK]  137.16,32.77 90 top
JP41  [1X04_NO_SILK]  8.13,66.29 270 top
JP42  [1X06_NO_SILK]  18.29,53.59 90 top
JP43  [1X04_NO_SILK]  21.34,66.29 270 top
JP44  [1X06_NO_SILK]  31.5,53.59 90 top
JP45  [1X04_NO_SILK]  34.54,66.29 270 top
JP46  [1X06_NO_SILK]  44.7,53.59 90 top
JP47  [1X04_NO_SILK]  47.75,66.29 270 top
JP48  [1X06_NO_SILK]  57.91,53.59 90 top
JP49  [1X04_NO_SILK]  60.96,66.29 270 top
JP50  [1X06_NO_SILK]  71.12,53.59 90 top
JP51  [1X04_NO_SILK]  74.17,66.29 270 top
JP52  [1X06_NO_SILK]  84.33,53.59 90 top
JP53  [1X04_NO_SILK]  87.38,66.29 270 top
JP54  [1X06_NO_SILK]  97.54,53.59 90 top
JP55  [1X04_NO_SILK]  100.58,66.29 270 top
JP56  [1X06_NO_SILK]  110.74,53.59 90 top
JP57  [1X04_NO_SILK]  113.79,66.29 270 top
JP58  [1X06_NO_SILK]  123.95,53.59 90 top
JP59  [1X04_NO_SILK]  127,66.29 270 top
JP60  [1X06_NO_SILK]  137.16,53.59 90 top
JP61  [1X04_NO_SILK]  8.13,87.12 270 top
JP62  [1X06_NO_SILK]  18.29,74.42 90 top
JP63  [1X04_NO_SILK]  21.34,87.12 270 top
JP64  [1X06_NO_SILK]  31.5,74.42 90 top
JP65  [1X04_NO_SILK]  34.54,87.12 270 top
JP66  [1X06_NO_SILK]  44.7,74.42 90 top
JP67  [1X04_NO_SILK]  47.75,87.12 270 top
JP68  [1X06_NO_SILK]  57.91,74.42 90 top
JP69  [1X04_NO_SILK]  60.96,87.12 270 top
JP70  [1X06_NO_SILK]  71.12,74.42 90 top
JP71  [1X04_NO_SILK]  74.17,87.12 270 top
JP72  [1X06_NO_SILK]  84.33,74.42 90 top
JP73  [1X04_NO_SILK]  87.38,87.12 270 top
JP74  [1X06_NO_SILK]  97.54,74.42 90 top
JP75  [1X04_NO_SILK]  100.58,87.12 270 top
JP76  [1X06_NO_SILK]  110.74,74.42 90 top
JP77  [1X04_NO_SILK]  113.79,87.12 270 top
JP78  [1X06_NO_SILK]  123.95,74.42 90 top
JP79  [1X04_NO_SILK]  127,87.12 270 top
JP80  [1X06_NO_SILK]  137.16,74.42 90 top
JP81  [1X04_NO_SILK]  8.13,107.95 270 top
JP82  [1X06_NO_SILK]  18.29,95.25 90 top
JP83  [1X04_NO_SILK]  21.34,107.95 270 top
JP84  [1X06_NO_SILK]  31.5,95.25 90 top
JP85  [1X04_NO_SILK]  34.54,107.95 270 top
JP86  [1X06_NO_SILK]  44.7,95.25 90 top
JP87  [1X04_NO_SILK]  47.75,107.95 270 top
JP88  [1X06_NO_SILK]  57.91,95.25 90 top
JP89  [1X04_NO_SILK]  60.96,107.95 270 top
JP90  [1X06_NO_SILK]  71.12,95.25 90 top
JP91  [1X04_NO_SILK]  74.17,107.95 270 top
JP92  [1X06_NO_SILK]  84.33,95.25 90 top
JP93  [1X04_NO_SILK]  87.38,107.95 270 top
JP94  [1X06_NO_SILK]  97.54,95.25 90 top
JP95  [1X04_NO_SILK]  100.58,107.95 270 top
JP96  [1X06_NO_SILK]  110.74,95.25 90 top
JP97  [1X04_NO_SILK]  113.79,107.95 270 top
JP98  [1X06_NO_SILK]  123.95,95.25 90 top
JP99  [1X04_NO_SILK]  127,107.95 270 top
JP100  [1X06_NO_SILK]  137.16,95.25 90 top
JP101  [1X04_NO_SILK]  8.13,128.78 270 top
JP102  [1X06_NO_SILK]  18.29,116.08 90 top
JP103  [1X04_NO_SILK]  21.34,128.78 270 top
JP104  [1X06_NO_SILK]  31.5,116.08 90 top
JP105  [1X04_NO_SILK]  34.54,128.78 270 top
JP106  [1X06_NO_SILK]  44.7,116.08 90 top
JP107  [1X04_NO_SILK]  47.75,128.78 270 top
JP108  [1X06_NO_SILK]  57.91,116.08 90 top
JP109  [1X04_NO_SILK]  60.96,128.78 270 top
JP110  [1X06_NO_SILK]  71.12,116.08 90 top
JP111  [1X04_NO_SILK]  74.17,128.78 270 top
JP112  [1X06_NO_SILK]  84.33,116.08 90 top
JP113  [1X04_NO_SILK]  87.38,128.78 270 top
JP114  [1X06_NO_SILK]  97.54,116.08 90 top
JP115  [1X04_NO_SILK]  100.58,128.78 270 top
JP116  [1X06_NO_SILK]  110.74,116.08 90 top
JP117  [1X04_NO_SILK]  113.79,128.78 270 top
JP118  [1X06_NO_SILK]  123.95,116.08 90 top
JP119  [1X04_NO_SILK]  127,128.78 270 top
JP120  [1X06_NO_SILK]  137.16,116.08 90 top
JP121  [1X04_NO_SILK]  8.13,149.61 270 top
JP122  [1X06_NO_SILK]  18.29,136.91 90 top
JP123  [1X04_NO_SILK]  21.34,149.61 270 top
JP124  [1X06_NO_SILK]  31.5,136.91 90 top
JP125  [1X04_NO_SILK]  34.54,149.61 270 top
JP126  [1X06_NO_SILK]  44.7,136.91 90 top
JP127  [1X04_NO_SILK]  47.75,149.61 270 top
JP128  [1X06_NO_SILK]  57.91,136.91 90 top
JP129  [1X04_NO_SILK]  60.96,149.61 270 top
JP130  [1X06_NO_SILK]  71.12,136.91 90 top
JP131  [1X04_NO_SILK]  74.17,149.61 270 top
JP132  [1X06_NO_SILK]  84.33,136.91 90 top
JP133  [1X04_NO_SILK]  87.38,149.61 270 top
JP134  [1X06_NO_SILK]  97.54,136.91 90 top
JP135  [1X04_NO_SILK]  100.58,149.61 270 top
JP136  [1X06_NO_SILK]  110.74,136.91 90 top
JP137  [1X04_NO_SILK]  113.79,149.61 270 top
JP138  [1X06_NO_SILK]  123.95,136.91 90 top
JP139  [1X04_NO_SILK]  127,149.61 270 top
JP140  [1X06_NO_SILK]  137.16,136.91 90 top
JP141  [1X04_NO_SILK]  8.13,170.43 270 top
JP142  [1X06_NO_SILK]  18.29,157.73 90 top
JP143  [1X04_NO_SILK]  21.34,170.43 270 top
JP144  [1X06_NO_SILK]  31.5,157.73 90 top
JP145  [1X04_NO_SILK]  34.54,170.43 270 top
JP146  [1X06_NO_SILK]  44.7,157.73 90 top
JP147  [1X04_NO_SILK]  47.75,170.43 270 top
JP148  [1X06_NO_SILK]  57.91,157.73 90 top
JP149  [1X04_NO_SILK]  60.96,170.43 270 top
JP150  [1X06_NO_SILK]  71.12,157.73 90 top
JP151  [1X04_NO_SILK]  74.17,170.43 270 top
JP152  [1X06_NO_SILK]  84.33,157.73 90 top
JP153  [1X04_NO_SILK]  87.38,170.43 270 top
JP154  [1X06_NO_SILK]  97.54,157.73 90 top
JP155  [1X04_NO_SILK]  100.58,170.43 270 top
JP156  [1X06_NO_SILK]  110.74,157.73 90 top
JP157  [1X04_NO_SILK]  113.79,170.43 270 top
JP158  [1X06_NO_SILK]  123.95,157.73 90 top
JP159  [1X04_NO_SILK]  127,170.43 270 top
JP160  [1X06_NO_SILK]  137.16,157.73 90 top
JP161  [1X04_NO_SILK]  8.13,191.26 270 top
JP162  [1X06_NO_SILK]  18.29,178.56 90 top
JP163  [1X04_NO_SILK]  21.34,191.26 270 top
JP164  [1X06_NO_SILK]  31.5,178.56 90 top
JP165  [1X04_NO_SILK]  34.54,191.26 270 top
JP166  [1X06_NO_SILK]  44.7,178.56 90 top
JP167  [1X04_NO_SILK]  47.75,191.26 270 top
JP168  [1X06_NO_SILK]  57.91,178.56 90 top
JP169  [1X04_NO_SILK]  60.96,191.26 270 top
JP170  [1X06_NO_SILK]  71.12,178.56 90 top
JP171  [1X04_NO_SILK]  74.17,191.26 270 top
JP172  [1X06_NO_SILK]  84.33,178.56 90 top
JP173  [1X04_NO_SILK]  87.38,191.26 270 top
JP174  [1X06_NO_SILK]  97.54,178.56 90 top
JP175  [1X04_NO_SILK]  100.58,191.26 270 top
JP176  [1X06_NO_SILK]  110.74,178.56 90 top
JP177  [1X04_NO_SILK]  113.79,191.26 270 top
JP178  [1X06_NO_SILK]  123.95,178.56 90 top
JP179  [1X04_NO_SILK]  127,191.26 270 top
JP180  [1X06_NO_SILK]  137.16,178.56 90 top
JP181  [1X04_NO_SILK]  8.13,212.09 270 top
JP182  [1X06_NO_SILK]  18.29,199.39 90 top
JP183  [1X04_NO_SILK]  21.34,212.09 270 top
JP184  [1X06_NO_SILK]  31.5,199.39 90 top
JP185  [1X04_NO_SILK]  34.54,212.09 270 top
JP186  [1X06_NO_SILK]  44.7,199.39 90 top
JP187  [1X04_NO_SILK]  47.75,212.09 270 top
JP188  [1X06_NO_SILK]  57.91,199.39 90 top
JP189  [1X04_NO_SILK]  60.96,212.09 270 top
JP190  [1X06_NO_SILK]  71.12,199.39 90 top
JP191  [1X04_NO_SILK]  74.17,212.09 270 top
JP192  [1X06_NO_SILK]  84.33,199.39 90 top
JP193  [1X04_NO_SILK]  87.38,212.09 270 top
JP194  [1X06_NO_SILK]  97.54,199.39 90 top
JP195  [1X04_NO_SILK]  100.58,212.09 270 top
JP196  [1X06_NO_SILK]  110.74,199.39 90 top
JP197  [1X04_NO_SILK]  113.79,212.09 270 top
JP198  [1X06_NO_SILK]  123.95,199.39 90 top
JP199  [1X04_NO_SILK]  127,212.09 270 top
JP200  [1X06_NO_SILK]  137.16,199.39 90 top
LOGO1  SFE_LOGO_FLAME.1_INCH  [SFE_LOGO_FLAME_.1]  14.32,16.86 0 bottom
LOGO2  SFE_LOGO_FLAME.1_INCH  [SFE_LOGO_FLAME_.1]  10.75,10.99 0 top
LOGO3  OSHW-LOGOS  [OSHW-LOGO-S]  17.34,8.76 0 top
LOGO4  SFE_LOGO_FLAME.1_INCH  [SFE_LOGO_FLAME_.1]  27.53,16.86 0 bottom
LOGO5  SFE_LOGO_FLAME.1_INCH  [SFE_LOGO_FLAME_.1]  23.96,10.99 0 top
LOGO6  OSHW-LOGOS  [OSHW-LOGO-S]  30.54,8.76 0 top
LOGO7  SFE_LOGO_FLAME.1_INCH  [SFE_LOGO_FLAME_.1]  40.74,16.86 0 bottom
LOGO8  SFE_LOGO_FLAME.1_INCH  [SFE_LOGO_FLAME_.1]  37.16,10.99 0 top
LOGO9  OSHW-LOGOS  [OSHW-LOGO-S]  43.75,8.76 0 top
LOGO10  SFE_LOGO_FLAME.1_INCH  [SFE_LOGO_FLAME_.1]  53.94,16.86 0 bottom
LOGO11  SFE_LOGO_FLAME.1_INCH  [SFE_LOGO_FLAME_.1]  50.37,10.99 0 top
LOGO12  OSHW-LOGOS  [OSHW-LOGO-S]  56.96,8.76 0 top
LOGO13  SFE_LOGO_FLAME.1_INCH  [SFE_LOGO_FLAME_.1]  67.15,16.86 0 bottom
LOGO14  SFE_LOGO_FLAME.1_INCH  [SFE_LOGO_FLAME_.1]  63.58,10.99 0 top
LOGO15  OSHW-LOGOS  [OSHW-LOGO-S]  70.17,8.76 0 top
LOGO16  SFE_LOGO_FLAME.1_INCH  [SFE_LOGO_FLAME_.1]  80.36,16.86 0 bottom
LOGO17  SFE_LOGO_FLAME.1_INCH  [SFE_LOGO_FLAME_.1]  76.79,10.99 0 top
LOGO18  OSHW-LOGOS  [OSHW-LOGO-S]  83.38,8.76 0 top
LOGO19  SFE_LOGO_FLAME.1_INCH  [SFE_LOGO_FLAME_.1]  93.57,16.86 0 bottom
LOGO20  SFE_LOGO_FLAME.1_INCH  [SFE_LOGO_FLAME_.1]  90,10.99 0 top
LOGO21  OSHW-LOGOS  [OSHW-LOGO-S]  96.58,8.76 0 top
LOGO22  SFE_LOGO_FLAME.1_INCH  [SFE_LOGO_FLAME_.1]  106.78,16.86 0 bottom
LOGO23  SFE_LOGO_FLAME.1_INCH  [SFE_LOGO_FLAME_.1]  103.2,10.99 0 top
LOGO24  OSHW-LOGOS  [OSHW-LOGO-S]  109.79,8.76 0 top
LOGO25  SFE_LOGO_FLAME.1_INCH  [SFE_LOGO_FLAME_.1]  119.98,16.86 0 bottom
LOGO26  SFE_LOGO_FLAME.1_INCH  [SFE_LOGO_FLAME_.1]  116.41,10.99 0 top
LOGO27  OSHW-LOGOS  [OSHW-LOGO-S]  123,8.76 0 top
LOGO28  SFE_LOGO_FLAME.1_INCH  [SFE_LOGO_FLAME_.1]  133.19,16.86 0 bottom
LOGO29  SFE_LOGO_FLAME.1_INCH  [SFE_LOGO_FLAME_.1]  129.62,10.99 0 top
LOGO30  OSHW-LOGOS  [OSHW-LOGO-S]  136.21,8.76 0 top
LOGO31  SFE_LOGO_FLAME.1_INCH  [SFE_LOGO_FLAME_.1]  14.32,37.69 0 bottom
LOGO32  SFE_LOGO_FLAME.1_INCH  [SFE_LOGO_FLAME_.1]  10.75,31.81 0 top
LOGO33  OSHW-LOGOS  [OSHW-LOGO-S]  17.34,29.59 0 top
LOGO34  SFE_LOGO_FLAME.1_INCH  [SFE_LOGO_FLAME_.1]  27.53,37.69 0 bottom
LOGO35  SFE_LOGO_FLAME.1_INCH  [SFE_LOGO_FLAME_.1]  23.96,31.81 0 top
LOGO36  OSHW-LOGOS  [OSHW-LOGO-S]  30.54,29.59 0 top
LOGO37  SFE_LOGO_FLAME.1_INCH  [SFE_LOGO_FLAME_.1]  40.74,37.69 0 bottom
LOGO38  SFE_LOGO_FLAME.1_INCH  [SFE_LOGO_FLAME_.1]  37.16,31.81 0 top
LOGO39  OSHW-LOGOS  [OSHW-LOGO-S]  43.75,29.59 0 top
LOGO40  SFE_LOGO_FLAME.1_INCH  [SFE_LOGO_FLAME_.1]  53.94,37.69 0 bottom
LOGO41  SFE_LOGO_FLAME.1_INCH  [SFE_LOGO_FLAME_.1]  50.37,31.81 0 top
LOGO42  OSHW-LOGOS  [OSHW-LOGO-S]  56.96,29.59 0 top
LOGO43  SFE_LOGO_FLAME.1_INCH  [SFE_LOGO_FLAME_.1]  67.15,37.69 0 bottom
LOGO44  SFE_LOGO_FLAME.1_INCH  [SFE_LOGO_FLAME_.1]  63.58,31.81 0 top
LOGO45  OSHW-LOGOS  [OSHW-LOGO-S]  70.17,29.59 0 top
LOGO46  SFE_LOGO_FLAME.1_INCH  [SFE_LOGO_FLAME_.1]  80.36,37.69 0 bottom
LOGO47  SFE_LOGO_FLAME.1_INCH  [SFE_LOGO_FLAME_.1]  76.79,31.81 0 top
LOGO48  OSHW-LOGOS  [OSHW-LOGO-S]  83.38,29.59 0 top
LOGO49  SFE_LOGO_FLAME.1_INCH  [SFE_LOGO_FLAME_.1]  93.57,37.69 0 bottom
LOGO50  SFE_LOGO_FLAME.1_INCH  [SFE_LOGO_FLAME_.1]  90,31.81 0 top
LOGO51  OSHW-LOGOS  [OSHW-LOGO-S]  96.58,29.59 0 top
LOGO52  SFE_LOGO_FLAME.1_INCH  [SFE_LOGO_FLAME_.1]  106.78,37.69 0 bottom
LOGO53  SFE_LOGO_FLAME.1_INCH  [SFE_LOGO_FLAME_.1]  103.2,31.81 0 top
LOGO54  OSHW-LOGOS  [OSHW-LOGO-S]  109.79,29.59 0 top
LOGO55  SFE_LOGO_FLAME.1_INCH  [SFE_LOGO_FLAME_.1]  119.98,37.69 0 bottom
LOGO56  SFE_LOGO_FLAME.1_INCH  [SFE_LOGO_FLAME_.1]  116.41,31.81 0 top
LOGO57  OSHW-LOGOS  [OSHW-LOGO-S]  123,29.59 0 top
LOGO58  SFE_LOGO_FLAME.1_INCH  [SFE_LOGO_FLAME_.1]  133.19,37.69 0 bottom
LOGO59  SFE_LOGO_FLAME.1_INCH  [SFE_LOGO_FLAME_.1]  129.62,31.81 0 top
LOGO60  OSHW-LOGOS  [OSHW-LOGO-S]  136.21,29.59 0 top
LOGO61  SFE_LOGO_FLAME.1_INCH  [SFE_LOGO_FLAME_.1]  14.32,58.52 0 bottom
LOGO62  SFE_LOGO_FLAME.1_INCH  [SFE_LOGO_FLAME_.1]  10.75,52.64 0 top
LOGO63  OSHW-LOGOS  [OSHW-LOGO-S]  17.34,50.42 0 top
LOGO64  SFE_LOGO_FLAME.1_INCH  [SFE_LOGO_FLAME_.1]  27.53,58.52 0 bottom
LOGO65  SFE_LOGO_FLAME.1_INCH  [SFE_LOGO_FLAME_.1]  23.96,52.64 0 top
LOGO66  OSHW-LOGOS  [OSHW-LOGO-S]  30.54,50.42 0 top
LOGO67  SFE_LOGO_FLAME.1_INCH  [SFE_LOGO_FLAME_.1]  40.74,58.52 0 bottom
LOGO68  SFE_LOGO_FLAME.1_INCH  [SFE_LOGO_FLAME_.1]  37.16,52.64 0 top
LOGO69  OSHW-LOGOS  [OSHW-LOGO-S]  43.75,50.42 0 top
LOGO70  SFE_LOGO_FLAME.1_INCH  [SFE_LOGO_FLAME_.1]  53.94,58.52 0 bottom
LOGO71  SFE_LOGO_FLAME.1_INCH  [SFE_LOGO_FLAME_.1]  50.37,52.64 0 top
LOGO72  OSHW-LOGOS  [OSHW-LOGO-S]  56.96,50.42 0 top
LOGO73  SFE_LOGO_FLAME.1_INCH  [SFE_LOGO_FLAME_.1]  67.15,58.52 0 bottom
LOGO74  SFE_LOGO_FLAME.1_INCH  [SFE_LOGO_FLAME_.1]  63.58,52.64 0 top
LOGO75  OSHW-LOGOS  [OSHW-LOGO-S]  70.17,50.42 0 top
LOGO76  SFE_LOGO_FLAME.1_INCH  [SFE_LOGO_FLAME_.1]  80.36,58.52 0 bottom
LOGO77  SFE_LOGO_FLAME.1_INCH  [SFE_LOGO_FLAME_.1]  76.79,52.64 0 top
LOGO78  OSHW-LOGOS  [OSHW-LOGO-S]  83.38,50.42 0 top
LOGO79  SFE_LOGO_FLAME.1_INCH  [SFE_LOGO_FLAME_.1]  93.57,58.52 0 bottom
LOGO80  SFE_LOGO_FLAME.1_INCH  [SFE_LOGO_FLAME_.1]  90,52.64 0 top
LOGO81  OSHW-LOGOS  [OSHW-LOGO-S]  96.58,50.42 0 top
LOGO82  SFE_LOGO_FLAME.1_INCH  [SFE_LOGO_FLAME_.1]  106.78,58.52 0 bottom
LOGO83  SFE_LOGO_FLAME.1_INCH  [SFE_LOGO_FLAME_.1]  103.2,52.64 0 top
LOGO84  OSHW-LOGOS  [OSHW-LOGO-S]  109.79,50.42 0 top
LOGO85  SFE_LOGO_FLAME.1_INCH  [SFE_LOGO_FLAME_.1]  119.98,58.52 0 bottom
LOGO86  SFE_LOGO_FLAME.1_INCH  [SFE_LOGO_FLAME_.1]  116.41,52.64 0 top
LOGO87  OSHW-LOGOS  [OSHW-LOGO-S]  123,50.42 0 top
LOGO88  SFE_LOGO_FLAME.1_INCH  [SFE_LOGO_FLAME_.1]  133.19,58.52 0 bottom
LOGO89  SFE_LOGO_FLAME.1_INCH  [SFE_LOGO_FLAME_.1]  129.62,52.64 0 top
LOGO90  OSHW-LOGOS  [OSHW-LOGO-S]  136.21,50.42 0 top
LOGO91  SFE_LOGO_FLAME.1_INCH  [SFE_LOGO_FLAME_.1]  14.32,79.34 0 bottom
LOGO92  SFE_LOGO_FLAME.1_INCH  [SFE_LOGO_FLAME_.1]  10.75,73.47 0 top
LOGO93  OSHW-LOGOS  [OSHW-LOGO-S]  17.34,71.25 0 top
LOGO94  SFE_LOGO_FLAME.1_INCH  [SFE_LOGO_FLAME_.1]  27.53,79.34 0 bottom
LOGO95  SFE_LOGO_FLAME.1_INCH  [SFE_LOGO_FLAME_.1]  23.96,73.47 0 top
LOGO96  OSHW-LOGOS  [OSHW-LOGO-S]  30.54,71.25 0 top
LOGO97  SFE_LOGO_FLAME.1_INCH  [SFE_LOGO_FLAME_.1]  40.74,79.34 0 bottom
LOGO98  SFE_LOGO_FLAME.1_INCH  [SFE_LOGO_FLAME_.1]  37.16,73.47 0 top
LOGO99  OSHW-LOGOS  [OSHW-LOGO-S]  43.75,71.25 0 top
LOGO100  SFE_LOGO_FLAME.1_INCH  [SFE_LOGO_FLAME_.1]  53.94,79.34 0 bottom
LOGO101  SFE_LOGO_FLAME.1_INCH  [SFE_LOGO_FLAME_.1]  50.37,73.47 0 top
LOGO102  OSHW-LOGOS  [OSHW-LOGO-S]  56.96,71.25 0 top
LOGO103  SFE_LOGO_FLAME.1_INCH  [SFE_LOGO_FLAME_.1]  67.15,79.34 0 bottom
LOGO104  SFE_LOGO_FLAME.1_INCH  [SFE_LOGO_FLAME_.1]  63.58,73.47 0 top
LOGO105  OSHW-LOGOS  [OSHW-LOGO-S]  70.17,71.25 0 top
LOGO106  SFE_LOGO_FLAME.1_INCH  [SFE_LOGO_FLAME_.1]  80.36,79.34 0 bottom
LOGO107  SFE_LOGO_FLAME.1_INCH  [SFE_LOGO_FLAME_.1]  76.79,73.47 0 top
LOGO108  OSHW-LOGOS  [OSHW-LOGO-S]  83.38,71.25 0 top
LOGO109  SFE_LOGO_FLAME.1_INCH  [SFE_LOGO_FLAME_.1]  93.57,79.34 0 bottom
LOGO110  SFE_LOGO_FLAME.1_INCH  [SFE_LOGO_FLAME_.1]  90,73.47 0 top
LOGO111  OSHW-LOGOS  [OSHW-LOGO-S]  96.58,71.25 0 top
LOGO112  SFE_LOGO_FLAME.1_INCH  [SFE_LOGO_FLAME_.1]  106.78,79.34 0 bottom
LOGO113  SFE_LOGO_FLAME.1_INCH  [SFE_LOGO_FLAME_.1]  103.2,73.47 0 top
LOGO114  OSHW-LOGOS  [OSHW-LOGO-S]  109.79,71.25 0 top
LOGO115  SFE_LOGO_FLAME.1_INCH  [SFE_LOGO_FLAME_.1]  119.98,79.34 0 bottom
LOGO116  SFE_LOGO_FLAME.1_INCH  [SFE_LOGO_FLAME_.1]  116.41,73.47 0 top
LOGO117  OSHW-LOGOS  [OSHW-LOGO-S]  123,71.25 0 top
LOGO118  SFE_LOGO_FLAME.1_INCH  [SFE_LOGO_FLAME_.1]  133.19,79.34 0 bottom
LOGO119  SFE_LOGO_FLAME.1_INCH  [SFE_LOGO_FLAME_.1]  129.62,73.47 0 top
LOGO120  OSHW-LOGOS  [OSHW-LOGO-S]  136.21,71.25 0 top
LOGO121  SFE_LOGO_FLAME.1_INCH  [SFE_LOGO_FLAME_.1]  14.32,100.17 0 bottom
LOGO122  SFE_LOGO_FLAME.1_INCH  [SFE_LOGO_FLAME_.1]  10.75,94.3 0 top
LOGO123  OSHW-LOGOS  [OSHW-LOGO-S]  17.34,92.08 0 top
LOGO124  SFE_LOGO_FLAME.1_INCH  [SFE_LOGO_FLAME_.1]  27.53,100.17 0 bottom
LOGO125  SFE_LOGO_FLAME.1_INCH  [SFE_LOGO_FLAME_.1]  23.96,94.3 0 top
LOGO126  OSHW-LOGOS  [OSHW-LOGO-S]  30.54,92.08 0 top
LOGO127  SFE_LOGO_FLAME.1_INCH  [SFE_LOGO_FLAME_.1]  40.74,100.17 0 bottom
LOGO128  SFE_LOGO_FLAME.1_INCH  [SFE_LOGO_FLAME_.1]  37.16,94.3 0 top
LOGO129  OSHW-LOGOS  [OSHW-LOGO-S]  43.75,92.08 0 top
LOGO130  SFE_LOGO_FLAME.1_INCH  [SFE_LOGO_FLAME_.1]  53.94,100.17 0 bottom
LOGO131  SFE_LOGO_FLAME.1_INCH  [SFE_LOGO_FLAME_.1]  50.37,94.3 0 top
LOGO132  OSHW-LOGOS  [OSHW-LOGO-S]  56.96,92.08 0 top
LOGO133  SFE_LOGO_FLAME.1_INCH  [SFE_LOGO_FLAME_.1]  67.15,100.17 0 bottom
LOGO134  SFE_LOGO_FLAME.1_INCH  [SFE_LOGO_FLAME_.1]  63.58,94.3 0 top
LOGO135  OSHW-LOGOS  [OSHW-LOGO-S]  70.17,92.08 0 top
LOGO136  SFE_LOGO_FLAME.1_INCH  [SFE_LOGO_FLAME_.1]  80.36,100.17 0 bottom
LOGO137  SFE_LOGO_FLAME.1_INCH  [SFE_LOGO_FLAME_.1]  76.79,94.3 0 top
LOGO138  OSHW-LOGOS  [OSHW-LOGO-S]  83.38,92.08 0 top
LOGO139  SFE_LOGO_FLAME.1_INCH  [SFE_LOGO_FLAME_.1]  93.57,100.17 0 bottom
LOGO140  SFE_LOGO_FLAME.1_INCH  [SFE_LOGO_FLAME_.1]  90,94.3 0 top
LOGO141  OSHW-LOGOS  [OSHW-LOGO-S]  96.58,92.08 0 top
LOGO142  SFE_LOGO_FLAME.1_INCH  [SFE_LOGO_FLAME_.1]  106.78,100.17 0 bottom
LOGO143  SFE_LOGO_FLAME.1_INCH  [SFE_LOGO_FLAME_.1]  103.2,94.3 0 top
LOGO144  OSHW-LOGOS  [OSHW-LOGO-S]  109.79,92.08 0 top
LOGO145  SFE_LOGO_FLAME.1_INCH  [SFE_LOGO_FLAME_.1]  119.98,100.17 0 bottom
LOGO146  SFE_LOGO_FLAME.1_INCH  [SFE_LOGO_FLAME_.1]  116.41,94.3 0 top
LOGO147  OSHW-LOGOS  [OSHW-LOGO-S]  123,92.08 0 top
LOGO148  SFE_LOGO_FLAME.1_INCH  [SFE_LOGO_FLAME_.1]  133.19,100.17 0 bottom
LOGO149  SFE_LOGO_FLAME.1_INCH  [SFE_LOGO_FLAME_.1]  129.62,94.3 0 top
LOGO150  OSHW-LOGOS  [OSHW-LOGO-S]  136.21,92.08 0 top
LOGO151  SFE_LOGO_FLAME.1_INCH  [SFE_LOGO_FLAME_.1]  14.32,121 0 bottom
LOGO152  SFE_LOGO_FLAME.1_INCH  [SFE_LOGO_FLAME_.1]  10.75,115.13 0 top
LOGO153  OSHW-LOGOS  [OSHW-LOGO-S]  17.34,112.9 0 top
LOGO154  SFE_LOGO_FLAME.1_INCH  [SFE_LOGO_FLAME_.1]  27.53,121 0 bottom
LOGO155  SFE_LOGO_FLAME.1_INCH  [SFE_LOGO_FLAME_.1]  23.96,115.13 0 top
LOGO156  OSHW-LOGOS  [OSHW-LOGO-S]  30.54,112.9 0 top
LOGO157  SFE_LOGO_FLAME.1_INCH  [SFE_LOGO_FLAME_.1]  40.74,121 0 bottom
LOGO158  SFE_LOGO_FLAME.1_INCH  [SFE_LOGO_FLAME_.1]  37.16,115.13 0 top
LOGO159  OSHW-LOGOS  [OSHW-LOGO-S]  43.75,112.9 0 top
LOGO160  SFE_LOGO_FLAME.1_INCH  [SFE_LOGO_FLAME_.1]  53.94,121 0 bottom
LOGO161  SFE_LOGO_FLAME.1_INCH  [SFE_LOGO_FLAME_.1]  50.37,115.13 0 top
LOGO162  OSHW-LOGOS  [OSHW-LOGO-S]  56.96,112.9 0 top
LOGO163  SFE_LOGO_FLAME.1_INCH  [SFE_LOGO_FLAME_.1]  67.15,121 0 bottom
LOGO164  SFE_LOGO_FLAME.1_INCH  [SFE_LOGO_FLAME_.1]  63.58,115.13 0 top
LOGO165  OSHW-LOGOS  [OSHW-LOGO-S]  70.17,112.9 0 top
LOGO166  SFE_LOGO_FLAME.1_INCH  [SFE_LOGO_FLAME_.1]  80.36,121 0 bottom
LOGO167  SFE_LOGO_FLAME.1_INCH  [SFE_LOGO_FLAME_.1]  76.79,115.13 0 top
LOGO168  OSHW-LOGOS  [OSHW-LOGO-S]  83.38,112.9 0 top
LOGO169  SFE_LOGO_FLAME.1_INCH  [SFE_LOGO_FLAME_.1]  93.57,121 0 bottom
LOGO170  SFE_LOGO_FLAME.1_INCH  [SFE_LOGO_FLAME_.1]  90,115.13 0 top
LOGO171  OSHW-LOGOS  [OSHW-LOGO-S]  96.58,112.9 0 top
LOGO172  SFE_LOGO_FLAME.1_INCH  [SFE_LOGO_FLAME_.1]  106.78,121 0 bottom
LOGO173  SFE_LOGO_FLAME.1_INCH  [SFE_LOGO_FLAME_.1]  103.2,115.13 0 top
LOGO174  OSHW-LOGOS  [OSHW-LOGO-S]  109.79,112.9 0 top
LOGO175  SFE_LOGO_FLAME.1_INCH  [SFE_LOGO_FLAME_.1]  119.98,121 0 bottom
LOGO176  SFE_LOGO_FLAME.1_INCH  [SFE_LOGO_FLAME_.1]  116.41,115.13 0 top
LOGO177  OSHW-LOGOS  [OSHW-LOGO-S]  123,112.9 0 top
LOGO178  SFE_LOGO_FLAME.1_INCH  [SFE_LOGO_FLAME_.1]  133.19,121 0 bottom
LOGO179  SFE_LOGO_FLAME.1_INCH  [SFE_LOGO_FLAME_.1]  129.62,115.13 0 top
LOGO180  OSHW-LOGOS  [OSHW-LOGO-S]  136.21,112.9 0 top
LOGO181  SFE_LOGO_FLAME.1_INCH  [SFE_LOGO_FLAME_.1]  14.32,141.83 0 bottom
LOGO182  SFE_LOGO_FLAME.1_INCH  [SFE_LOGO_FLAME_.1]  10.75,135.95 0 top
LOGO183  OSHW-LOGOS  [OSHW-LOGO-S]  17.34,133.73 0 top
LOGO184  SFE_LOGO_FLAME.1_INCH  [SFE_LOGO_FLAME_.1]  27.53,141.83 0 bottom
LOGO185  SFE_LOGO_FLAME.1_INCH  [SFE_LOGO_FLAME_.1]  23.96,135.95 0 top
LOGO186  OSHW-LOGOS  [OSHW-LOGO-S]  30.54,133.73 0 top
LOGO187  SFE_LOGO_FLAME.1_INCH  [SFE_LOGO_FLAME_.1]  40.74,141.83 0 bottom
LOGO188  SFE_LOGO_FLAME.1_INCH  [SFE_LOGO_FLAME_.1]  37.16,135.95 0 top
LOGO189  OSHW-LOGOS  [OSHW-LOGO-S]  43.75,133.73 0 top
LOGO190  SFE_LOGO_FLAME.1_INCH  [SFE_LOGO_FLAME_.1]  53.94,141.83 0 bottom
LOGO191  SFE_LOGO_FLAME.1_INCH  [SFE_LOGO_FLAME_.1]  50.37,135.95 0 top
LOGO192  OSHW-LOGOS  [OSHW-LOGO-S]  56.96,133.73 0 top
LOGO193  SFE_LOGO_FLAME.1_INCH  [SFE_LOGO_FLAME_.1]  67.15,141.83 0 bottom
LOGO194  SFE_LOGO_FLAME.1_INCH  [SFE_LOGO_FLAME_.1]  63.58,135.95 0 top
LOGO195  OSHW-LOGOS  [OSHW-LOGO-S]  70.17,133.73 0 top
LOGO196  SFE_LOGO_FLAME.1_INCH  [SFE_LOGO_FLAME_.1]  80.36,141.83 0 bottom
LOGO197  SFE_LOGO_FLAME.1_INCH  [SFE_LOGO_FLAME_.1]  76.79,135.95 0 top
LOGO198  OSHW-LOGOS  [OSHW-LOGO-S]  83.38,133.73 0 top
LOGO199  SFE_LOGO_FLAME.1_INCH  [SFE_LOGO_FLAME_.1]  93.57,141.83 0 bottom
LOGO200  SFE_LOGO_FLAME.1_INCH  [SFE_LOGO_FLAME_.1]  90,135.95 0 top
LOGO201  OSHW-LOGOS  [OSHW-LOGO-S]  96.58,133.73 0 top
LOGO202  SFE_LOGO_FLAME.1_INCH  [SFE_LOGO_FLAME_.1]  106.78,141.83 0 bottom
LOGO203  SFE_LOGO_FLAME.1_INCH  [SFE_LOGO_FLAME_.1]  103.2,135.95 0 top
LOGO204  OSHW-LOGOS  [OSHW-LOGO-S]  109.79,133.73 0 top
LOGO205  SFE_LOGO_FLAME.1_INCH  [SFE_LOGO_FLAME_.1]  119.98,141.83 0 bottom
LOGO206  SFE_LOGO_FLAME.1_INCH  [SFE_LOGO_FLAME_.1]  116.41,135.95 0 top
LOGO207  OSHW-LOGOS  [OSHW-LOGO-S]  123,133.73 0 top
LOGO208  SFE_LOGO_FLAME.1_INCH  [SFE_LOGO_FLAME_.1]  133.19,141.83 0 bottom
LOGO209  SFE_LOGO_FLAME.1_INCH  [SFE_LOGO_FLAME_.1]  129.62,135.95 0 top
LOGO210  OSHW-LOGOS  [OSHW-LOGO-S]  136.21,133.73 0 top
LOGO211  SFE_LOGO_FLAME.1_INCH  [SFE_LOGO_FLAME_.1]  14.32,162.66 0 bottom
LOGO212  SFE_LOGO_FLAME.1_INCH  [SFE_LOGO_FLAME_.1]  10.75,156.78 0 top
LOGO213  OSHW-LOGOS  [OSHW-LOGO-S]  17.34,154.56 0 top
LOGO214  SFE_LOGO_FLAME.1_INCH  [SFE_LOGO_FLAME_.1]  27.53,162.66 0 bottom
LOGO215  SFE_LOGO_FLAME.1_INCH  [SFE_LOGO_FLAME_.1]  23.96,156.78 0 top
LOGO216  OSHW-LOGOS  [OSHW-LOGO-S]  30.54,154.56 0 top
LOGO217  SFE_LOGO_FLAME.1_INCH  [SFE_LOGO_FLAME_.1]  40.74,162.66 0 bottom
LOGO218  SFE_LOGO_FLAME.1_INCH  [SFE_LOGO_FLAME_.1]  37.16,156.78 0 top
LOGO219  OSHW-LOGOS  [OSHW-LOGO-S]  43.75,154.56 0 top
LOGO220  SFE_LOGO_FLAME.1_INCH  [SFE_LOGO_FLAME_.1]  53.94,162.66 0 bottom
LOGO221  SFE_LOGO_FLAME.1_INCH  [SFE_LOGO_FLAME_.1]  50.37,156.78 0 top
LOGO222  OSHW-LOGOS  [OSHW-LOGO-S]  56.96,154.56 0 top
LOGO223  SFE_LOGO_FLAME.1_INCH  [SFE_LOGO_FLAME_.1]  67.15,162.66 0 bottom
LOGO224  SFE_LOGO_FLAME.1_INCH  [SFE_LOGO_FLAME_.1]  63.58,156.78 0 top
LOGO225  OSHW-LOGOS  [OSHW-LOGO-S]  70.17,154.56 0 top
LOGO226  SFE_LOGO_FLAME.1_INCH  [SFE_LOGO_FLAME_.1]  80.36,162.66 0 bottom
LOGO227  SFE_LOGO_FLAME.1_INCH  [SFE_LOGO_FLAME_.1]  76.79,156.78 0 top
LOGO228  OSHW-LOGOS  [OSHW-LOGO-S]  83.38,154.56 0 top
LOGO229  SFE_LOGO_FLAME.1_INCH  [SFE_LOGO_FLAME_.1]  93.57,162.66 0 bottom
LOGO230  SFE_LOGO_FLAME.1_INCH  [SFE_LOGO_FLAME_.1]  90,156.78 0 top
LOGO231  OSHW-LOGOS  [OSHW-LOGO-S]  96.58,154.56 0 top
LOGO232  SFE_LOGO_FLAME.1_INCH  [SFE_LOGO_FLAME_.1]  106.78,162.66 0 bottom
LOGO233  SFE_LOGO_FLAME.1_INCH  [SFE_LOGO_FLAME_.1]  103.2,156.78 0 top
LOGO234  OSHW-LOGOS  [OSHW-LOGO-S]  109.79,154.56 0 top
LOGO235  SFE_LOGO_FLAME.1_INCH  [SFE_LOGO_FLAME_.1]  119.98,162.66 0 bottom
LOGO236  SFE_LOGO_FLAME.1_INCH  [SFE_LOGO_FLAME_.1]  116.41,156.78 0 top
LOGO237  OSHW-LOGOS  [OSHW-LOGO-S]  123,154.56 0 top
LOGO238  SFE_LOGO_FLAME.1_INCH  [SFE_LOGO_FLAME_.1]  133.19,162.66 0 bottom
LOGO239  SFE_LOGO_FLAME.1_INCH  [SFE_LOGO_FLAME_.1]  129.62,156.78 0 top
LOGO240  OSHW-LOGOS  [OSHW-LOGO-S]  136.21,154.56 0 top
LOGO241  SFE_LOGO_FLAME.1_INCH  [SFE_LOGO_FLAME_.1]  14.32,183.48 0 bottom
LOGO242  SFE_LOGO_FLAME.1_INCH  [SFE_LOGO_FLAME_.1]  10.75,177.61 0 top
LOGO243  OSHW-LOGOS  [OSHW-LOGO-S]  17.34,175.39 0 top
LOGO244  SFE_LOGO_FLAME.1_INCH  [SFE_LOGO_FLAME_.1]  27.53,183.48 0 bottom
LOGO245  SFE_LOGO_FLAME.1_INCH  [SFE_LOGO_FLAME_.1]  23.96,177.61 0 top
LOGO246  OSHW-LOGOS  [OSHW-LOGO-S]  30.54,175.39 0 top
LOGO247  SFE_LOGO_FLAME.1_INCH  [SFE_LOGO_FLAME_.1]  40.74,183.48 0 bottom
LOGO248  SFE_LOGO_FLAME.1_INCH  [SFE_LOGO_FLAME_.1]  37.16,177.61 0 top
LOGO249  OSHW-LOGOS  [OSHW-LOGO-S]  43.75,175.39 0 top
LOGO250  SFE_LOGO_FLAME.1_INCH  [SFE_LOGO_FLAME_.1]  53.94,183.48 0 bottom
LOGO251  SFE_LOGO_FLAME.1_INCH  [SFE_LOGO_FLAME_.1]  50.37,177.61 0 top
LOGO252  OSHW-LOGOS  [OSHW-LOGO-S]  56.96,175.39 0 top
LOGO253  SFE_LOGO_FLAME.1_INCH  [SFE_LOGO_FLAME_.1]  67.15,183.48 0 bottom
LOGO254  SFE_LOGO_FLAME.1_INCH  [SFE_LOGO_FLAME_.1]  63.58,177.61 0 top
LOGO255  OSHW-LOGOS  [OSHW-LOGO-S]  70.17,175.39 0 top
LOGO256  SFE_LOGO_FLAME.1_INCH  [SFE_LOGO_FLAME_.1]  80.36,183.48 0 bottom
LOGO257  SFE_LOGO_FLAME.1_INCH  [SFE_LOGO_FLAME_.1]  76.79,177.61 0 top
LOGO258  OSHW-LOGOS  [OSHW-LOGO-S]  83.38,175.39 0 top
LOGO259  SFE_LOGO_FLAME.1_INCH  [SFE_LOGO_FLAME_.1]  93.57,183.48 0 bottom
LOGO260  SFE_LOGO_FLAME.1_INCH  [SFE_LOGO_FLAME_.1]  90,177.61 0 top
LOGO261  OSHW-LOGOS  [OSHW-LOGO-S]  96.58,175.39 0 top
LOGO262  SFE_LOGO_FLAME.1_INCH  [SFE_LOGO_FLAME_.1]  106.78,183.48 0 bottom
LOGO263  SFE_LOGO_FLAME.1_INCH  [SFE_LOGO_FLAME_.1]  103.2,177.61 0 top
LOGO264  OSHW-LOGOS  [OSHW-LOGO-S]  109.79,175.39 0 top
LOGO265  SFE_LOGO_FLAME.1_INCH  [SFE_LOGO_FLAME_.1]  119.98,183.48 0 bottom
LOGO266  SFE_LOGO_FLAME.1_INCH  [SFE_LOGO_FLAME_.1]  116.41,177.61 0 top
LOGO267  OSHW-LOGOS  [OSHW-LOGO-S]  123,175.39 0 top
LOGO268  SFE_LOGO_FLAME.1_INCH  [SFE_LOGO_FLAME_.1]  133.19,183.48 0 bottom
LOGO269  SFE_LOGO_FLAME.1_INCH  [SFE_LOGO_FLAME_.1]  129.62,177.61 0 top
LOGO270  OSHW-LOGOS  [OSHW-LOGO-S]  136.21,175.39 0 top
LOGO271  SFE_LOGO_FLAME.1_INCH  [SFE_LOGO_FLAME_.1]  14.32,204.31 0 bottom
LOGO272  SFE_LOGO_FLAME.1_INCH  [SFE_LOGO_FLAME_.1]  10.75,198.44 0 top
LOGO273  OSHW-LOGOS  [OSHW-LOGO-S]  17.34,196.22 0 top
LOGO274  SFE_LOGO_FLAME.1_INCH  [SFE_LOGO_FLAME_.1]  27.53,204.31 0 bottom
LOGO275  SFE_LOGO_FLAME.1_INCH  [SFE_LOGO_FLAME_.1]  23.96,198.44 0 top
LOGO276  OSHW-LOGOS  [OSHW-LOGO-S]  30.54,196.22 0 top
LOGO277  SFE_LOGO_FLAME.1_INCH  [SFE_LOGO_FLAME_.1]  40.74,204.31 0 bottom
LOGO278  SFE_LOGO_FLAME.1_INCH  [SFE_LOGO_FLAME_.1]  37.16,198.44 0 top
LOGO279  OSHW-LOGOS  [OSHW-LOGO-S]  43.75,196.22 0 top
LOGO280  SFE_LOGO_FLAME.1_INCH  [SFE_LOGO_FLAME_.1]  53.94,204.31 0 bottom
LOGO281  SFE_LOGO_FLAME.1_INCH  [SFE_LOGO_FLAME_.1]  50.37,198.44 0 top
LOGO282  OSHW-LOGOS  [OSHW-LOGO-S]  56.96,196.22 0 top
LOGO283  SFE_LOGO_FLAME.1_INCH  [SFE_LOGO_FLAME_.1]  67.15,204.31 0 bottom
LOGO284  SFE_LOGO_FLAME.1_INCH  [SFE_LOGO_FLAME_.1]  63.58,198.44 0 top
LOGO285  OSHW-LOGOS  [OSHW-LOGO-S]  70.17,196.22 0 top
LOGO286  SFE_LOGO_FLAME.1_INCH  [SFE_LOGO_FLAME_.1]  80.36,204.31 0 bottom
LOGO287  SFE_LOGO_FLAME.1_INCH  [SFE_LOGO_FLAME_.1]  76.79,198.44 0 top
LOGO288  OSHW-LOGOS  [OSHW-LOGO-S]  83.38,196.22 0 top
LOGO289  SFE_LOGO_FLAME.1_INCH  [SFE_LOGO_FLAME_.1]  93.57,204.31 0 bottom
LOGO290  SFE_LOGO_FLAME.1_INCH  [SFE_LOGO_FLAME_.1]  90,198.44 0 top
LOGO291  OSHW-LOGOS  [OSHW-LOGO-S]  96.58,196.22 0 top
LOGO292  SFE_LOGO_FLAME.1_INCH  [SFE_LOGO_FLAME_.1]  106.78,204.31 0 bottom
LOGO293  SFE_LOGO_FLAME.1_INCH  [SFE_LOGO_FLAME_.1]  103.2,198.44 0 top
LOGO294  OSHW-LOGOS  [OSHW-LOGO-S]  109.79,196.22 0 top
LOGO295  SFE_LOGO_FLAME.1_INCH  [SFE_LOGO_FLAME_.1]  119.98,204.31 0 bottom